# EAGLE board Single_Supply_Logic_Level_Converter-Panel-Panel (EAGLE 9.1.0), part 1 of 7
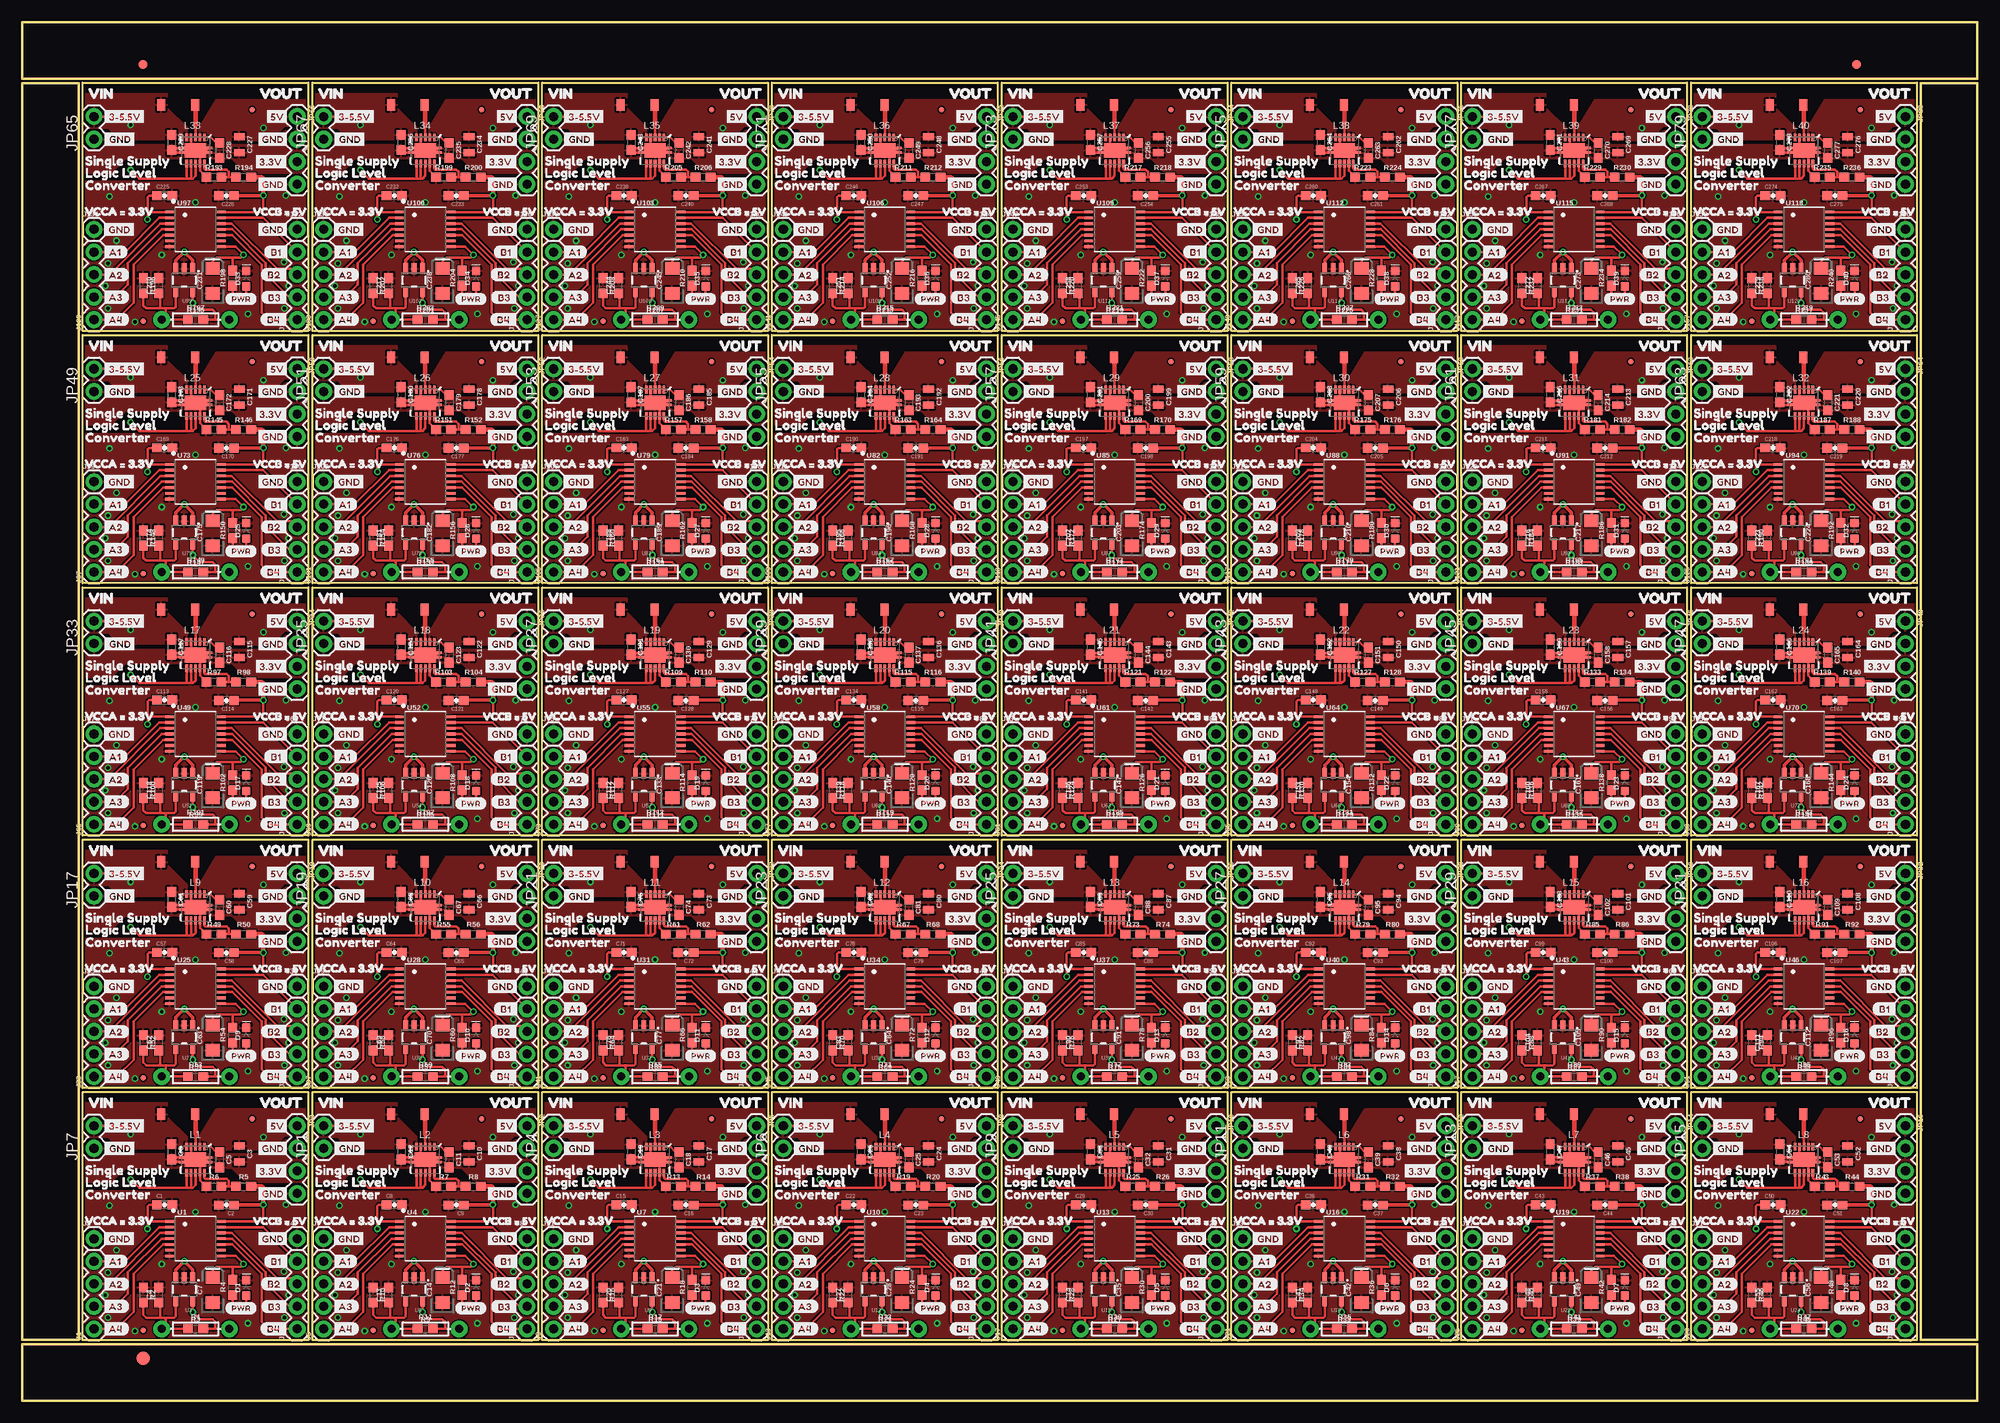
[diagram p0: board, top side]
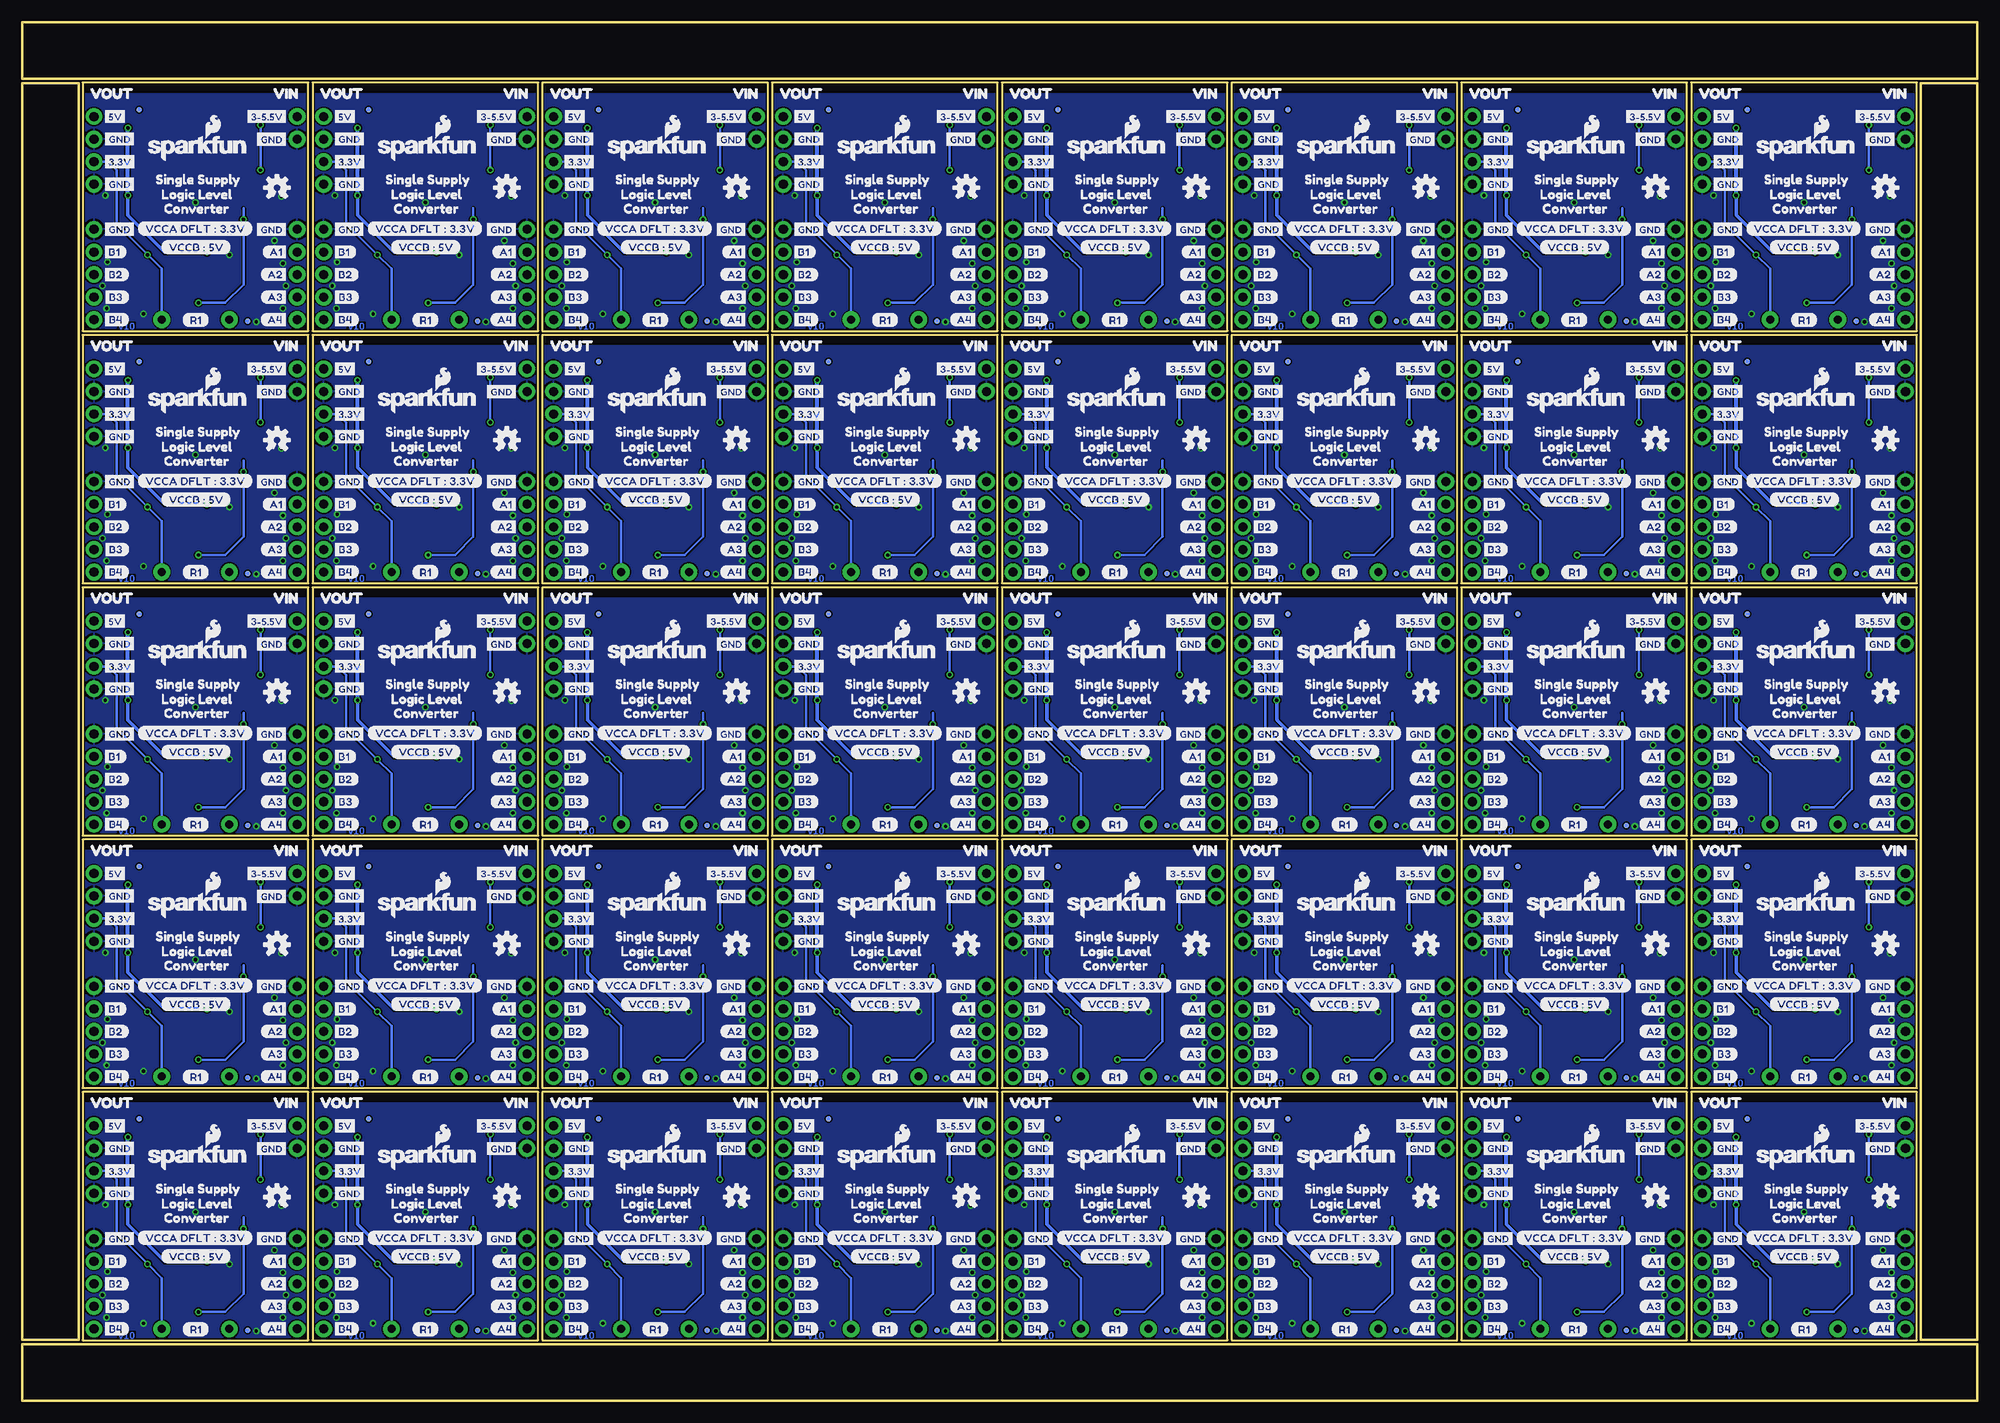
[diagram p1: board, bottom side, seen from below]

Size 220.01 x 155.14 mm. Coordinates in mm from the lower left corner, seen from the top.
Outline: 6.81,6.81 6.81,34.75 32.21,34.75 32.21,6.81 6.81,6.81
Outline: 32.66,6.81 32.66,34.75 58.06,34.75 58.06,6.81 32.66,6.81
Outline: 58.52,6.81 58.52,34.75 83.92,34.75 83.92,6.81 58.52,6.81
Outline: 84.38,6.81 84.38,34.75 109.78,34.75 109.78,6.81 84.38,6.81
Outline: 110.24,6.81 110.24,34.75 135.64,34.75 135.64,6.81 110.24,6.81
Outline: 136.09,6.81 136.09,34.75 161.49,34.75 161.49,6.81 136.09,6.81
Outline: 161.95,6.81 161.95,34.75 187.35,34.75 187.35,6.81 161.95,6.81
Outline: 187.81,6.81 187.81,34.75 213.21,34.75 213.21,6.81 187.81,6.81
Outline: 6.81,35.2 6.81,63.14 32.21,63.14 32.21,35.2 6.81,35.2
Outline: 32.66,35.2 32.66,63.14 58.06,63.14 58.06,35.2 32.66,35.2
Outline: 58.52,35.2 58.52,63.14 83.92,63.14 83.92,35.2 58.52,35.2
Outline: 84.38,35.2 84.38,63.14 109.78,63.14 109.78,35.2 84.38,35.2
Outline: 110.24,35.2 110.24,63.14 135.64,63.14 135.64,35.2 110.24,35.2
Outline: 136.09,35.2 136.09,63.14 161.49,63.14 161.49,35.2 136.09,35.2
Outline: 161.95,35.2 161.95,63.14 187.35,63.14 187.35,35.2 161.95,35.2
Outline: 187.81,35.2 187.81,63.14 213.21,63.14 213.21,35.2 187.81,35.2
Outline: 6.81,63.6 6.81,91.54 32.21,91.54 32.21,63.6 6.81,63.6
Outline: 32.66,63.6 32.66,91.54 58.06,91.54 58.06,63.6 32.66,63.6
Outline: 58.52,63.6 58.52,91.54 83.92,91.54 83.92,63.6 58.52,63.6
Outline: 84.38,63.6 84.38,91.54 109.78,91.54 109.78,63.6 84.38,63.6
Outline: 110.24,63.6 110.24,91.54 135.64,91.54 135.64,63.6 110.24,63.6
Outline: 136.09,63.6 136.09,91.54 161.49,91.54 161.49,63.6 136.09,63.6
Outline: 161.95,63.6 161.95,91.54 187.35,91.54 187.35,63.6 161.95,63.6
Outline: 187.81,63.6 187.81,91.54 213.21,91.54 213.21,63.6 187.81,63.6
Outline: 6.81,92 6.81,119.94 32.21,119.94 32.21,92 6.81,92
Outline: 32.66,92 32.66,119.94 58.06,119.94 58.06,92 32.66,92
Outline: 58.52,92 58.52,119.94 83.92,119.94 83.92,92 58.52,92
Outline: 84.38,92 84.38,119.94 109.78,119.94 109.78,92 84.38,92
Outline: 110.24,92 110.24,119.94 135.64,119.94 135.64,92 110.24,92
Outline: 136.09,92 136.09,119.94 161.49,119.94 161.49,92 136.09,92
Outline: 161.95,92 161.95,119.94 187.35,119.94 187.35,92 161.95,92
Outline: 187.81,92 187.81,119.94 213.21,119.94 213.21,92 187.81,92
Outline: 6.81,120.4 6.81,148.34 32.21,148.34 32.21,120.4 6.81,120.4
Outline: 32.66,120.4 32.66,148.34 58.06,148.34 58.06,120.4 32.66,120.4
Outline: 58.52,120.4 58.52,148.34 83.92,148.34 83.92,120.4 58.52,120.4
Outline: 84.38,120.4 84.38,148.34 109.78,148.34 109.78,120.4 84.38,120.4
Outline: 110.24,120.4 110.24,148.34 135.64,148.34 135.64,120.4 110.24,120.4
Outline: 136.09,120.4 136.09,148.34 161.49,148.34 161.49,120.4 136.09,120.4
Outline: 161.95,120.4 161.95,148.34 187.35,148.34 187.35,120.4 161.95,120.4
Outline: 187.81,120.4 187.81,148.34 213.21,148.34 213.21,120.4 187.81,120.4
Outline: 0,6.35 220.02,6.35 220.02,0 0,0 0,6.35
Outline: 213.67,148.29 220.02,148.29 220.02,6.86 213.67,6.86 213.67,148.29
Outline: 0,155.14 220.02,155.14 220.02,148.79 0,148.79 0,155.14
Outline: 0,148.29 6.35,148.29 6.35,6.86 0,6.86 0,148.29
Copper layers (1*16): Top 0.035mm / dielectric 1.5mm / Bottom 0.035mm
Design rules "SparkFun-2-layer-PCBWay-LIMIT": minimum track width 6mil, minimum drill 0.3mm, track to track 6mil, track to pad 6mil, pad to pad 6mil, via to via 6mil, smd to smd 6mil, copper to edge 6mil, drill to drill 6mil, minimum pad ring 7mil, minimum via ring 7mil, stop-mask expansion 4mil, vias tented up to drill 25mil, thermal gap 10mil
Net classes: 0 Default: width 0.203 mm

## Footprints (pad centres in the part's own frame; a part is rotated, then mirrored left to right if it is on the bottom)
0603-CAP = smd 1.1 x 1: 1 -0.85,0; 2 0.85,0
0805 = smd 0.8 x 1.2: 1 -0.9,0; 2 0.9,0
0603 = smd 1.1 x 1: 1 -0.85,0; 2 0.85,0
EIA3216 = smd 1.4 x 1.6: + 1.4,0; - -1.4,0
LED-0603 = smd 1 x 1: A -0.877,0; C 0.877,0
FIDUCIAL-1X2 = smd 1 x 1: 1 0,0
FIDUCIAL-1.5X3 = smd 1.5 x 1.5: 1 0,0
FIDUCIAL-MICRO = smd 0.635 x 0.635: 1 0,0
1X04 = drill 1.016 pad 1.88: 1 0,0; 2 2.54,0; 3 5.08,0; 4 7.62,0
1X01 = drill 1.016 pad 1.88: 1 0,0
1X02 = drill 1.016 pad 1.88: 1 0,0; 2 2.54,0
INDUCTOR_2.2UH = smd 0.9 x 1.3: P$1 -1.9,0; P$2 1.9,0
AXIAL-0.3 = drill 0.9 pad 1.88: P$1 -3.81,0; P$2 3.81,0
TSSOP14 = smd 0.305 x 0.991: 1 -1.95,-2.918; 2 -1.3,-2.918; 3 -0.65,-2.918; 4 0,-2.918; 5 0.65,-2.918; 6 1.3,-2.918; 7 1.95,-2.918; 8 1.95,2.918; 9 1.3,2.918; 10 0.65,2.918; 11 0,2.918; 12 -0.65,2.918; 13 -1.3,2.918; 14 -1.95,2.918
QFN-10_PAD = smd 0.297 x 0.85: 1 -1,-1.475; 2 -0.5,-1.475; 3 0,-1.475; 4 0.5,-1.475; 5 1,-1.475; 6 1,1.475; 7 0.5,1.475; 8 0,1.475; 9 -0.5,1.475; 10 -1,1.475 | smd 0.7 x 0.28: 11 -1.5,0.25; 12 -1.5,-0.25; 13 1.5,0.25; 14 1.5,-0.25 | smd 2.4 x 1.65: 15 0,0
SOT23-5 = smd 0.55 x 1.2: 1 -0.95,-1.3; 2 0,-1.3; 3 0.95,-1.3; 4 0.95,1.3; 5 -0.95,1.3

## Placement (x,y rotation side)
C1  0.1uF  [0603-CAP]  16.01,22.05 0 top
C2  0.1uF  [0603-CAP]  22.98,22.02 180 top
C3  22uF  [0805]  24.43,27.76 270 top
C4  470pF  [0603]  15.38,11.89 90 top
C5  0.1uF  [0603]  22.21,27.13 270 top
C6  10uF  [0603]  16.81,28.03 270 top
C7  10uF  [EIA3216]  21.44,12.45 90 top
C8  0.1uF  [0603-CAP]  41.87,22.05 0 top
C9  0.1uF  [0603-CAP]  48.84,22.02 180 top
C10  22uF  [0805]  50.29,27.76 270 top
C11  0.1uF  [0603]  48.06,27.13 270 top
C12  10uF  [0603]  42.66,28.03 270 top
C13  470pF  [0603]  41.24,11.89 90 top
C14  10uF  [EIA3216]  47.3,12.45 90 top
C15  0.1uF  [0603-CAP]  67.73,22.05 0 top
C16  0.1uF  [0603-CAP]  74.7,22.02 180 top
C17  22uF  [0805]  76.14,27.76 270 top
C18  0.1uF  [0603]  73.92,27.13 270 top
C19  10uF  [0603]  68.52,28.03 270 top
C20  470pF  [0603]  67.09,11.89 90 top
C21  10uF  [EIA3216]  73.16,12.45 90 top
C22  0.1uF  [0603-CAP]  93.59,22.05 0 top
C23  0.1uF  [0603-CAP]  100.55,22.02 180 top
C24  22uF  [0805]  102,27.76 270 top
C25  0.1uF  [0603]  99.78,27.13 270 top
C26  10uF  [0603]  94.38,28.03 270 top
C27  470pF  [0603]  92.95,11.89 90 top
C28  10uF  [EIA3216]  99.02,12.45 90 top
C29  0.1uF  [0603-CAP]  119.44,22.05 0 top
C30  0.1uF  [0603-CAP]  126.41,22.02 180 top
C31  22uF  [0805]  127.86,27.76 270 top
C32  0.1uF  [0603]  125.63,27.13 270 top
C33  10uF  [0603]  120.23,28.03 270 top
C34  470pF  [0603]  118.81,11.89 90 top
C35  10uF  [EIA3216]  124.87,12.45 90 top
C36  0.1uF  [0603-CAP]  145.3,22.05 0 top
C37  0.1uF  [0603-CAP]  152.27,22.02 180 top
C38  22uF  [0805]  153.71,27.76 270 top
C39  0.1uF  [0603]  151.49,27.13 270 top
C40  10uF  [0603]  146.09,28.03 270 top
C41  470pF  [0603]  144.67,11.89 90 top
C42  10uF  [EIA3216]  150.73,12.45 90 top
C43  0.1uF  [0603-CAP]  171.16,22.05 0 top
C44  0.1uF  [0603-CAP]  178.12,22.02 180 top
C45  22uF  [0805]  179.57,27.76 270 top
C46  0.1uF  [0603]  177.35,27.13 270 top
C47  10uF  [0603]  171.95,28.03 270 top
C48  470pF  [0603]  170.52,11.89 90 top
C49  10uF  [EIA3216]  176.59,12.45 90 top
C50  0.1uF  [0603-CAP]  197.02,22.05 0 top
C51  0.1uF  [0603-CAP]  203.98,22.02 180 top
C52  22uF  [0805]  205.43,27.76 270 top
C53  0.1uF  [0603]  203.21,27.13 270 top
C54  10uF  [0603]  197.81,28.03 270 top
C55  470pF  [0603]  196.38,11.89 90 top
C56  10uF  [EIA3216]  202.44,12.45 90 top
C57  0.1uF  [0603-CAP]  16.01,50.44 0 top
C58  0.1uF  [0603-CAP]  22.98,50.42 180 top
C59  22uF  [0805]  24.43,56.16 270 top
C60  0.1uF  [0603]  22.21,55.52 270 top
C61  10uF  [0603]  16.81,56.42 270 top
C62  470pF  [0603]  15.38,40.28 90 top
C63  10uF  [EIA3216]  21.44,40.84 90 top
C64  0.1uF  [0603-CAP]  41.87,50.44 0 top
C65  0.1uF  [0603-CAP]  48.84,50.42 180 top
C66  22uF  [0805]  50.29,56.16 270 top
C67  0.1uF  [0603]  48.06,55.52 270 top
C68  10uF  [0603]  42.66,56.42 270 top
C69  470pF  [0603]  41.24,40.28 90 top
C70  10uF  [EIA3216]  47.3,40.84 90 top
C71  0.1uF  [0603-CAP]  67.73,50.44 0 top
C72  0.1uF  [0603-CAP]  74.7,50.42 180 top
C73  22uF  [0805]  76.14,56.16 270 top
C74  0.1uF  [0603]  73.92,55.52 270 top
C75  10uF  [0603]  68.52,56.42 270 top
C76  470pF  [0603]  67.09,40.28 90 top
C77  10uF  [EIA3216]  73.16,40.84 90 top
C78  0.1uF  [0603-CAP]  93.59,50.44 0 top
C79  0.1uF  [0603-CAP]  100.55,50.42 180 top
C80  22uF  [0805]  102,56.16 270 top
C81  0.1uF  [0603]  99.78,55.52 270 top
C82  10uF  [0603]  94.38,56.42 270 top
C83  470pF  [0603]  92.95,40.28 90 top
C84  10uF  [EIA3216]  99.02,40.84 90 top
C85  0.1uF  [0603-CAP]  119.44,50.44 0 top
C86  0.1uF  [0603-CAP]  126.41,50.42 180 top
C87  22uF  [0805]  127.86,56.16 270 top
C88  0.1uF  [0603]  125.63,55.52 270 top
C89  10uF  [0603]  120.23,56.42 270 top
C90  470pF  [0603]  118.81,40.28 90 top
C91  10uF  [EIA3216]  124.87,40.84 90 top
C92  0.1uF  [0603-CAP]  145.3,50.44 0 top
C93  0.1uF  [0603-CAP]  152.27,50.42 180 top
C94  22uF  [0805]  153.71,56.16 270 top
C95  0.1uF  [0603]  151.49,55.52 270 top
C96  10uF  [0603]  146.09,56.42 270 top
C97  470pF  [0603]  144.67,40.28 90 top
C98  10uF  [EIA3216]  150.73,40.84 90 top
C99  0.1uF  [0603-CAP]  171.16,50.44 0 top
C100  0.1uF  [0603-CAP]  178.12,50.42 180 top
C101  22uF  [0805]  179.57,56.16 270 top
C102  0.1uF  [0603]  177.35,55.52 270 top
C103  10uF  [0603]  171.95,56.42 270 top
C104  470pF  [0603]  170.52,40.28 90 top
C105  10uF  [EIA3216]  176.59,40.84 90 top
C106  0.1uF  [0603-CAP]  197.02,50.44 0 top
C107  0.1uF  [0603-CAP]  203.98,50.42 180 top
C108  22uF  [0805]  205.43,56.16 270 top
C109  0.1uF  [0603]  203.21,55.52 270 top
C110  10uF  [0603]  197.81,56.42 270 top
C111  470pF  [0603]  196.38,40.28 90 top
C112  10uF  [EIA3216]  202.44,40.84 90 top
C113  0.1uF  [0603-CAP]  16.01,78.84 0 top
C114  0.1uF  [0603-CAP]  22.98,78.82 180 top
C115  22uF  [0805]  24.43,84.56 270 top
C116  0.1uF  [0603]  22.21,83.92 270 top
C117  10uF  [0603]  16.81,84.82 270 top
C118  470pF  [0603]  15.38,68.68 90 top
C119  10uF  [EIA3216]  21.44,69.24 90 top
C120  0.1uF  [0603-CAP]  41.87,78.84 0 top
C121  0.1uF  [0603-CAP]  48.84,78.82 180 top
C122  22uF  [0805]  50.29,84.56 270 top
C123  0.1uF  [0603]  48.06,83.92 270 top
C124  10uF  [0603]  42.66,84.82 270 top
C125  470pF  [0603]  41.24,68.68 90 top
C126  10uF  [EIA3216]  47.3,69.24 90 top
C127  0.1uF  [0603-CAP]  67.73,78.84 0 top
C128  0.1uF  [0603-CAP]  74.7,78.82 180 top
C129  22uF  [0805]  76.14,84.56 270 top
C130  0.1uF  [0603]  73.92,83.92 270 top
C131  10uF  [0603]  68.52,84.82 270 top
C132  470pF  [0603]  67.09,68.68 90 top
C133  10uF  [EIA3216]  73.16,69.24 90 top
C134  0.1uF  [0603-CAP]  93.59,78.84 0 top
C135  0.1uF  [0603-CAP]  100.55,78.82 180 top
C136  22uF  [0805]  102,84.56 270 top
C137  0.1uF  [0603]  99.78,83.92 270 top
C138  10uF  [0603]  94.38,84.82 270 top
C139  470pF  [0603]  92.95,68.68 90 top
C140  10uF  [EIA3216]  99.02,69.24 90 top
C141  0.1uF  [0603-CAP]  119.44,78.84 0 top
C142  0.1uF  [0603-CAP]  126.41,78.82 180 top
C143  22uF  [0805]  127.86,84.56 270 top
C144  0.1uF  [0603]  125.63,83.92 270 top
C145  10uF  [0603]  120.23,84.82 270 top
C146  470pF  [0603]  118.81,68.68 90 top
C147  10uF  [EIA3216]  124.87,69.24 90 top
C148  0.1uF  [0603-CAP]  145.3,78.84 0 top
C149  0.1uF  [0603-CAP]  152.27,78.82 180 top
C150  22uF  [0805]  153.71,84.56 270 top
C151  0.1uF  [0603]  151.49,83.92 270 top
C152  10uF  [0603]  146.09,84.82 270 top
C153  470pF  [0603]  144.67,68.68 90 top
C154  10uF  [EIA3216]  150.73,69.24 90 top
C155  0.1uF  [0603-CAP]  171.16,78.84 0 top
C156  0.1uF  [0603-CAP]  178.12,78.82 180 top
C157  22uF  [0805]  179.57,84.56 270 top
C158  0.1uF  [0603]  177.35,83.92 270 top
C159  10uF  [0603]  171.95,84.82 270 top
C160  470pF  [0603]  170.52,68.68 90 top
C161  10uF  [EIA3216]  176.59,69.24 90 top
C162  0.1uF  [0603-CAP]  197.02,78.84 0 top
C163  0.1uF  [0603-CAP]  203.98,78.82 180 top
C164  22uF  [0805]  205.43,84.56 270 top
C165  0.1uF  [0603]  203.21,83.92 270 top
C166  10uF  [0603]  197.81,84.82 270 top
C167  470pF  [0603]  196.38,68.68 90 top
C168  10uF  [EIA3216]  202.44,69.24 90 top
C169  0.1uF  [0603-CAP]  16.01,107.24 0 top
C170  0.1uF  [0603-CAP]  22.98,107.21 180 top
C171  22uF  [0805]  24.43,112.95 270 top
C172  0.1uF  [0603]  22.21,112.32 270 top
C173  10uF  [0603]  16.81,113.22 270 top
C174  470pF  [0603]  15.38,97.08 90 top
C175  10uF  [EIA3216]  21.44,97.64 90 top
C176  0.1uF  [0603-CAP]  41.87,107.24 0 top
C177  0.1uF  [0603-CAP]  48.84,107.21 180 top
C178  22uF  [0805]  50.29,112.95 270 top
C179  0.1uF  [0603]  48.06,112.32 270 top
C180  10uF  [0603]  42.66,113.22 270 top
C181  470pF  [0603]  41.24,97.08 90 top
C182  10uF  [EIA3216]  47.3,97.64 90 top
C183  0.1uF  [0603-CAP]  67.73,107.24 0 top
C184  0.1uF  [0603-CAP]  74.7,107.21 180 top
C185  22uF  [0805]  76.14,112.95 270 top
C186  0.1uF  [0603]  73.92,112.32 270 top
C187  10uF  [0603]  68.52,113.22 270 top
C188  470pF  [0603]  67.09,97.08 90 top
C189  10uF  [EIA3216]  73.16,97.64 90 top
C190  0.1uF  [0603-CAP]  93.59,107.24 0 top
C191  0.1uF  [0603-CAP]  100.55,107.21 180 top
C192  22uF  [0805]  102,112.95 270 top
C193  0.1uF  [0603]  99.78,112.32 270 top
C194  10uF  [0603]  94.38,113.22 270 top
C195  470pF  [0603]  92.95,97.08 90 top
C196  10uF  [EIA3216]  99.02,97.64 90 top
C197  0.1uF  [0603-CAP]  119.44,107.24 0 top
C198  0.1uF  [0603-CAP]  126.41,107.21 180 top
C199  22uF  [0805]  127.86,112.95 270 top
C200  0.1uF  [0603]  125.63,112.32 270 top
C201  10uF  [0603]  120.23,113.22 270 top
C202  470pF  [0603]  118.81,97.08 90 top
C203  10uF  [EIA3216]  124.87,97.64 90 top
C204  0.1uF  [0603-CAP]  145.3,107.24 0 top
C205  0.1uF  [0603-CAP]  152.27,107.21 180 top
C206  22uF  [0805]  153.71,112.95 270 top
C207  0.1uF  [0603]  151.49,112.32 270 top
C208  10uF  [0603]  146.09,113.22 270 top
C209  470pF  [0603]  144.67,97.08 90 top
C210  10uF  [EIA3216]  150.73,97.64 90 top
C211  0.1uF  [0603-CAP]  171.16,107.24 0 top
C212  0.1uF  [0603-CAP]  178.12,107.21 180 top
C213  22uF  [0805]  179.57,112.95 270 top
C214  0.1uF  [0603]  177.35,112.32 270 top
C215  10uF  [0603]  171.95,113.22 270 top
C216  470pF  [0603]  170.52,97.08 90 top
C217  10uF  [EIA3216]  176.59,97.64 90 top
C218  0.1uF  [0603-CAP]  197.02,107.24 0 top
C219  0.1uF  [0603-CAP]  203.98,107.21 180 top
C220  22uF  [0805]  205.43,112.95 270 top
C221  0.1uF  [0603]  203.21,112.32 270 top
C222  10uF  [0603]  197.81,113.22 270 top
C223  470pF  [0603]  196.38,97.08 90 top
C224  10uF  [EIA3216]  202.44,97.64 90 top
C225  0.1uF  [0603-CAP]  16.01,135.64 0 top
C226  0.1uF  [0603-CAP]  22.98,135.61 180 top
C227  22uF  [0805]  24.43,141.35 270 top
C228  0.1uF  [0603]  22.21,140.72 270 top
C229  10uF  [0603]  16.81,141.61 270 top
C230  470pF  [0603]  15.38,125.48 90 top
C231  10uF  [EIA3216]  21.44,126.03 90 top
C232  0.1uF  [0603-CAP]  41.87,135.64 0 top
C233  0.1uF  [0603-CAP]  48.84,135.61 180 top
C234  22uF  [0805]  50.29,141.35 270 top
C235  0.1uF  [0603]  48.06,140.72 270 top
C236  10uF  [0603]  42.66,141.61 270 top
C237  470pF  [0603]  41.24,125.48 90 top
C238  10uF  [EIA3216]  47.3,126.03 90 top
C239  0.1uF  [0603-CAP]  67.73,135.64 0 top
C240  0.1uF  [0603-CAP]  74.7,135.61 180 top
C241  22uF  [0805]  76.14,141.35 270 top
C242  0.1uF  [0603]  73.92,140.72 270 top
C243  10uF  [0603]  68.52,141.61 270 top
C244  470pF  [0603]  67.09,125.48 90 top
C245  10uF  [EIA3216]  73.16,126.03 90 top
C246  0.1uF  [0603-CAP]  93.59,135.64 0 top
C247  0.1uF  [0603-CAP]  100.55,135.61 180 top
C248  22uF  [0805]  102,141.35 270 top
C249  0.1uF  [0603]  99.78,140.72 270 top
C250  10uF  [0603]  94.38,141.61 270 top
C251  470pF  [0603]  92.95,125.48 90 top
C252  10uF  [EIA3216]  99.02,126.03 90 top
C253  0.1uF  [0603-CAP]  119.44,135.64 0 top
C254  0.1uF  [0603-CAP]  126.41,135.61 180 top
C255  22uF  [0805]  127.86,141.35 270 top
C256  0.1uF  [0603]  125.63,140.72 270 top
C257  10uF  [0603]  120.23,141.61 270 top
C258  470pF  [0603]  118.81,125.48 90 top
C259  10uF  [EIA3216]  124.87,126.03 90 top
C260  0.1uF  [0603-CAP]  145.3,135.64 0 top
C261  0.1uF  [0603-CAP]  152.27,135.61 180 top
C262  22uF  [0805]  153.71,141.35 270 top
C263  0.1uF  [0603]  151.49,140.72 270 top
C264  10uF  [0603]  146.09,141.61 270 top
C265  470pF  [0603]  144.67,125.48 90 top
C266  10uF  [EIA3216]  150.73,126.03 90 top
C267  0.1uF  [0603-CAP]  171.16,135.64 0 top
C268  0.1uF  [0603-CAP]  178.12,135.61 180 top
C269  22uF  [0805]  179.57,141.35 270 top
C270  0.1uF  [0603]  177.35,140.72 270 top
C271  10uF  [0603]  171.95,141.61 270 top
C272  470pF  [0603]  170.52,125.48 90 top
C273  10uF  [EIA3216]  176.59,126.03 90 top
C274  0.1uF  [0603-CAP]  197.02,135.64 0 top
C275  0.1uF  [0603-CAP]  203.98,135.61 180 top
C276  22uF  [0805]  205.43,141.35 270 top
C277  0.1uF  [0603]  203.21,140.72 270 top
C278  10uF  [0603]  197.81,141.61 270 top
C279  470pF  [0603]  196.38,125.48 90 top
C280  10uF  [EIA3216]  202.44,126.03 90 top
D1  RED  [LED-0603]  25.21,12.7 90 top
D2  RED  [LED-0603]  51.07,12.7 90 top
D3  RED  [LED-0603]  76.92,12.7 90 top
D4  RED  [LED-0603]  102.78,12.7 90 top
D5  RED  [LED-0603]  128.64,12.7 90 top
D6  RED  [LED-0603]  154.5,12.7 90 top
D7  RED  [LED-0603]  180.35,12.7 90 top
D8  RED  [LED-0603]  206.21,12.7 90 top
D9  RED  [LED-0603]  25.21,41.1 90 top
D10  RED  [LED-0603]  51.07,41.1 90 top
D11  RED  [LED-0603]  76.92,41.1 90 top
D12  RED  [LED-0603]  102.78,41.1 90 top
D13  RED  [LED-0603]  128.64,41.1 90 top
D14  RED  [LED-0603]  154.5,41.1 90 top
D15  RED  [LED-0603]  180.35,41.1 90 top
D16  RED  [LED-0603]  206.21,41.1 90 top
D17  RED  [LED-0603]  25.21,69.49 90 top
D18  RED  [LED-0603]  51.07,69.49 90 top
D19  RED  [LED-0603]  76.92,69.49 90 top
D20  RED  [LED-0603]  102.78,69.49 90 top
D21  RED  [LED-0603]  128.64,69.49 90 top
D22  RED  [LED-0603]  154.5,69.49 90 top
D23  RED  [LED-0603]  180.35,69.49 90 top
D24  RED  [LED-0603]  206.21,69.49 90 top
D25  RED  [LED-0603]  25.21,97.89 90 top
D26  RED  [LED-0603]  51.07,97.89 90 top
D27  RED  [LED-0603]  76.92,97.89 90 top
D28  RED  [LED-0603]  102.78,97.89 90 top
D29  RED  [LED-0603]  128.64,97.89 90 top
D30  RED  [LED-0603]  154.5,97.89 90 top
D31  RED  [LED-0603]  180.35,97.89 90 top
D32  RED  [LED-0603]  206.21,97.89 90 top
D33  RED  [LED-0603]  25.21,126.29 90 top
D34  RED  [LED-0603]  51.07,126.29 90 top
D35  RED  [LED-0603]  76.92,126.29 90 top
D36  RED  [LED-0603]  102.78,126.29 90 top
D37  RED  [LED-0603]  128.64,126.29 90 top
D38  RED  [LED-0603]  154.5,126.29 90 top
D39  RED  [LED-0603]  180.35,126.29 90 top
D40  RED  [LED-0603]  206.21,126.29 90 top
E$1  [FIDUCIAL-1X2]  13.61,150.38 0 top
E$2  [FIDUCIAL-1X2]  206.4,150.38 0 top
E$3  [FIDUCIAL-1.5X3]  13.61,4.76 0 top
FD1  FIDUCIALUFIDUCIAL  [FIDUCIAL-MICRO]  25.86,31.73 0 top
FD2  FIDUCIALUFIDUCIAL  [FIDUCIAL-MICRO]  25.86,31.73 0 bottom
FD3  FIDUCIALUFIDUCIAL  [FIDUCIAL-MICRO]  13.63,7.92 0 top
FD4  FIDUCIALUFIDUCIAL  [FIDUCIAL-MICRO]  13.63,7.92 0 bottom
FD5  FIDUCIALUFIDUCIAL  [FIDUCIAL-MICRO]  51.71,31.73 0 top
FD6  FIDUCIALUFIDUCIAL  [FIDUCIAL-MICRO]  51.71,31.73 0 bottom
FD7  FIDUCIALUFIDUCIAL  [FIDUCIAL-MICRO]  39.49,7.92 0 bottom
FD8  FIDUCIALUFIDUCIAL  [FIDUCIAL-MICRO]  39.49,7.92 0 top
FD9  FIDUCIALUFIDUCIAL  [FIDUCIAL-MICRO]  77.57,31.73 0 top
FD10  FIDUCIALUFIDUCIAL  [FIDUCIAL-MICRO]  77.57,31.73 0 bottom
FD11  FIDUCIALUFIDUCIAL  [FIDUCIAL-MICRO]  65.35,7.92 0 bottom
FD12  FIDUCIALUFIDUCIAL  [FIDUCIAL-MICRO]  65.35,7.92 0 top
FD13  FIDUCIALUFIDUCIAL  [FIDUCIAL-MICRO]  103.43,31.73 0 top
FD14  FIDUCIALUFIDUCIAL  [FIDUCIAL-MICRO]  103.43,31.73 0 bottom
FD15  FIDUCIALUFIDUCIAL  [FIDUCIAL-MICRO]  91.21,7.92 0 bottom
FD16  FIDUCIALUFIDUCIAL  [FIDUCIAL-MICRO]  91.21,7.92 0 top
FD17  FIDUCIALUFIDUCIAL  [FIDUCIAL-MICRO]  129.29,31.73 0 top
FD18  FIDUCIALUFIDUCIAL  [FIDUCIAL-MICRO]  129.29,31.73 0 bottom
FD19  FIDUCIALUFIDUCIAL  [FIDUCIAL-MICRO]  117.06,7.92 0 bottom
FD20  FIDUCIALUFIDUCIAL  [FIDUCIAL-MICRO]  117.06,7.92 0 top
FD21  FIDUCIALUFIDUCIAL  [FIDUCIAL-MICRO]  155.14,31.73 0 top
FD22  FIDUCIALUFIDUCIAL  [FIDUCIAL-MICRO]  155.14,31.73 0 bottom
FD23  FIDUCIALUFIDUCIAL  [FIDUCIAL-MICRO]  142.92,7.92 0 bottom
FD24  FIDUCIALUFIDUCIAL  [FIDUCIAL-MICRO]  142.92,7.92 0 top
FD25  FIDUCIALUFIDUCIAL  [FIDUCIAL-MICRO]  181,31.73 0 top
FD26  FIDUCIALUFIDUCIAL  [FIDUCIAL-MICRO]  181,31.73 0 bottom
FD27  FIDUCIALUFIDUCIAL  [FIDUCIAL-MICRO]  168.78,7.92 0 bottom
FD28  FIDUCIALUFIDUCIAL  [FIDUCIAL-MICRO]  168.78,7.92 0 top
FD29  FIDUCIALUFIDUCIAL  [FIDUCIAL-MICRO]  206.86,31.73 0 top
FD30  FIDUCIALUFIDUCIAL  [FIDUCIAL-MICRO]  206.86,31.73 0 bottom
FD31  FIDUCIALUFIDUCIAL  [FIDUCIAL-MICRO]  194.63,7.92 0 bottom
FD32  FIDUCIALUFIDUCIAL  [FIDUCIAL-MICRO]  194.63,7.92 0 top
FD33  FIDUCIALUFIDUCIAL  [FIDUCIAL-MICRO]  25.86,60.13 0 top
FD34  FIDUCIALUFIDUCIAL  [FIDUCIAL-MICRO]  25.86,60.13 0 bottom
FD35  FIDUCIALUFIDUCIAL  [FIDUCIAL-MICRO]  13.63,36.32 0 bottom
FD36  FIDUCIALUFIDUCIAL  [FIDUCIAL-MICRO]  13.63,36.32 0 top
FD37  FIDUCIALUFIDUCIAL  [FIDUCIAL-MICRO]  51.71,60.13 0 top
FD38  FIDUCIALUFIDUCIAL  [FIDUCIAL-MICRO]  51.71,60.13 0 bottom
FD39  FIDUCIALUFIDUCIAL  [FIDUCIAL-MICRO]  39.49,36.32 0 bottom
FD40  FIDUCIALUFIDUCIAL  [FIDUCIAL-MICRO]  39.49,36.32 0 top
FD41  FIDUCIALUFIDUCIAL  [FIDUCIAL-MICRO]  77.57,60.13 0 top
FD42  FIDUCIALUFIDUCIAL  [FIDUCIAL-MICRO]  77.57,60.13 0 bottom
FD43  FIDUCIALUFIDUCIAL  [FIDUCIAL-MICRO]  65.35,36.32 0 bottom
FD44  FIDUCIALUFIDUCIAL  [FIDUCIAL-MICRO]  65.35,36.32 0 top
FD45  FIDUCIALUFIDUCIAL  [FIDUCIAL-MICRO]  103.43,60.13 0 top
FD46  FIDUCIALUFIDUCIAL  [FIDUCIAL-MICRO]  103.43,60.13 0 bottom
FD47  FIDUCIALUFIDUCIAL  [FIDUCIAL-MICRO]  91.21,36.32 0 bottom
FD48  FIDUCIALUFIDUCIAL  [FIDUCIAL-MICRO]  91.21,36.32 0 top
FD49  FIDUCIALUFIDUCIAL  [FIDUCIAL-MICRO]  129.29,60.13 0 top
FD50  FIDUCIALUFIDUCIAL  [FIDUCIAL-MICRO]  129.29,60.13 0 bottom
FD51  FIDUCIALUFIDUCIAL  [FIDUCIAL-MICRO]  117.06,36.32 0 bottom
FD52  FIDUCIALUFIDUCIAL  [FIDUCIAL-MICRO]  117.06,36.32 0 top
FD53  FIDUCIALUFIDUCIAL  [FIDUCIAL-MICRO]  155.14,60.13 0 top
FD54  FIDUCIALUFIDUCIAL  [FIDUCIAL-MICRO]  155.14,60.13 0 bottom
FD55  FIDUCIALUFIDUCIAL  [FIDUCIAL-MICRO]  142.92,36.32 0 bottom
FD56  FIDUCIALUFIDUCIAL  [FIDUCIAL-MICRO]  142.92,36.32 0 top
FD57  FIDUCIALUFIDUCIAL  [FIDUCIAL-MICRO]  181,60.13 0 top
FD58  FIDUCIALUFIDUCIAL  [FIDUCIAL-MICRO]  181,60.13 0 bottom
FD59  FIDUCIALUFIDUCIAL  [FIDUCIAL-MICRO]  168.78,36.32 0 bottom
FD60  FIDUCIALUFIDUCIAL  [FIDUCIAL-MICRO]  168.78,36.32 0 top
FD61  FIDUCIALUFIDUCIAL  [FIDUCIAL-MICRO]  206.86,60.13 0 top
FD62  FIDUCIALUFIDUCIAL  [FIDUCIAL-MICRO]  206.86,60.13 0 bottom
FD63  FIDUCIALUFIDUCIAL  [FIDUCIAL-MICRO]  194.63,36.32 0 bottom
FD64  FIDUCIALUFIDUCIAL  [FIDUCIAL-MICRO]  194.63,36.32 0 top
FD65  FIDUCIALUFIDUCIAL  [FIDUCIAL-MICRO]  25.86,88.53 0 top
FD66  FIDUCIALUFIDUCIAL  [FIDUCIAL-MICRO]  25.86,88.53 0 bottom
FD67  FIDUCIALUFIDUCIAL  [FIDUCIAL-MICRO]  13.63,64.71 0 bottom
FD68  FIDUCIALUFIDUCIAL  [FIDUCIAL-MICRO]  13.63,64.71 0 top
FD69  FIDUCIALUFIDUCIAL  [FIDUCIAL-MICRO]  51.71,88.53 0 top
FD70  FIDUCIALUFIDUCIAL  [FIDUCIAL-MICRO]  51.71,88.53 0 bottom
FD71  FIDUCIALUFIDUCIAL  [FIDUCIAL-MICRO]  39.49,64.71 0 bottom
FD72  FIDUCIALUFIDUCIAL  [FIDUCIAL-MICRO]  39.49,64.71 0 top
FD73  FIDUCIALUFIDUCIAL  [FIDUCIAL-MICRO]  77.57,88.53 0 top
FD74  FIDUCIALUFIDUCIAL  [FIDUCIAL-MICRO]  77.57,88.53 0 bottom
FD75  FIDUCIALUFIDUCIAL  [FIDUCIAL-MICRO]  65.35,64.71 0 bottom
FD76  FIDUCIALUFIDUCIAL  [FIDUCIAL-MICRO]  65.35,64.71 0 top
FD77  FIDUCIALUFIDUCIAL  [FIDUCIAL-MICRO]  103.43,88.53 0 top
FD78  FIDUCIALUFIDUCIAL  [FIDUCIAL-MICRO]  103.43,88.53 0 bottom
FD79  FIDUCIALUFIDUCIAL  [FIDUCIAL-MICRO]  91.21,64.71 0 bottom
FD80  FIDUCIALUFIDUCIAL  [FIDUCIAL-MICRO]  91.21,64.71 0 top
FD81  FIDUCIALUFIDUCIAL  [FIDUCIAL-MICRO]  129.29,88.53 0 top
FD82  FIDUCIALUFIDUCIAL  [FIDUCIAL-MICRO]  129.29,88.53 0 bottom
FD83  FIDUCIALUFIDUCIAL  [FIDUCIAL-MICRO]  117.06,64.71 0 bottom
FD84  FIDUCIALUFIDUCIAL  [FIDUCIAL-MICRO]  117.06,64.71 0 top
FD85  FIDUCIALUFIDUCIAL  [FIDUCIAL-MICRO]  155.14,88.53 0 top
FD86  FIDUCIALUFIDUCIAL  [FIDUCIAL-MICRO]  155.14,88.53 0 bottom
FD87  FIDUCIALUFIDUCIAL  [FIDUCIAL-MICRO]  142.92,64.71 0 bottom
FD88  FIDUCIALUFIDUCIAL  [FIDUCIAL-MICRO]  142.92,64.71 0 top
FD89  FIDUCIALUFIDUCIAL  [FIDUCIAL-MICRO]  181,88.53 0 top
FD90  FIDUCIALUFIDUCIAL  [FIDUCIAL-MICRO]  181,88.53 0 bottom
FD91  FIDUCIALUFIDUCIAL  [FIDUCIAL-MICRO]  168.78,64.71 0 bottom
FD92  FIDUCIALUFIDUCIAL  [FIDUCIAL-MICRO]  168.78,64.71 0 top
FD93  FIDUCIALUFIDUCIAL  [FIDUCIAL-MICRO]  206.86,88.53 0 top
FD94  FIDUCIALUFIDUCIAL  [FIDUCIAL-MICRO]  206.86,88.53 0 bottom
FD95  FIDUCIALUFIDUCIAL  [FIDUCIAL-MICRO]  194.63,64.71 0 bottom
FD96  FIDUCIALUFIDUCIAL  [FIDUCIAL-MICRO]  194.63,64.71 0 top
FD97  FIDUCIALUFIDUCIAL  [FIDUCIAL-MICRO]  25.86,116.92 0 top
FD98  FIDUCIALUFIDUCIAL  [FIDUCIAL-MICRO]  25.86,116.92 0 bottom
FD99  FIDUCIALUFIDUCIAL  [FIDUCIAL-MICRO]  13.63,93.11 0 bottom
FD100  FIDUCIALUFIDUCIAL  [FIDUCIAL-MICRO]  13.63,93.11 0 top
FD101  FIDUCIALUFIDUCIAL  [FIDUCIAL-MICRO]  51.71,116.92 0 top
FD102  FIDUCIALUFIDUCIAL  [FIDUCIAL-MICRO]  51.71,116.92 0 bottom
FD103  FIDUCIALUFIDUCIAL  [FIDUCIAL-MICRO]  39.49,93.11 0 bottom
FD104  FIDUCIALUFIDUCIAL  [FIDUCIAL-MICRO]  39.49,93.11 0 top
FD105  FIDUCIALUFIDUCIAL  [FIDUCIAL-MICRO]  77.57,116.92 0 top
FD106  FIDUCIALUFIDUCIAL  [FIDUCIAL-MICRO]  77.57,116.92 0 bottom
FD107  FIDUCIALUFIDUCIAL  [FIDUCIAL-MICRO]  65.35,93.11 0 bottom
FD108  FIDUCIALUFIDUCIAL  [FIDUCIAL-MICRO]  65.35,93.11 0 top
FD109  FIDUCIALUFIDUCIAL  [FIDUCIAL-MICRO]  103.43,116.92 0 top
FD110  FIDUCIALUFIDUCIAL  [FIDUCIAL-MICRO]  103.43,116.92 0 bottom
FD111  FIDUCIALUFIDUCIAL  [FIDUCIAL-MICRO]  91.21,93.11 0 bottom
FD112  FIDUCIALUFIDUCIAL  [FIDUCIAL-MICRO]  91.21,93.11 0 top
FD113  FIDUCIALUFIDUCIAL  [FIDUCIAL-MICRO]  129.29,116.92 0 top
FD114  FIDUCIALUFIDUCIAL  [FIDUCIAL-MICRO]  129.29,116.92 0 bottom
FD115  FIDUCIALUFIDUCIAL  [FIDUCIAL-MICRO]  117.06,93.11 0 bottom
FD116  FIDUCIALUFIDUCIAL  [FIDUCIAL-MICRO]  117.06,93.11 0 top
FD117  FIDUCIALUFIDUCIAL  [FIDUCIAL-MICRO]  155.14,116.92 0 top
FD118  FIDUCIALUFIDUCIAL  [FIDUCIAL-MICRO]  155.14,116.92 0 bottom
FD119  FIDUCIALUFIDUCIAL  [FIDUCIAL-MICRO]  142.92,93.11 0 bottom
FD120  FIDUCIALUFIDUCIAL  [FIDUCIAL-MICRO]  142.92,93.11 0 top
FD121  FIDUCIALUFIDUCIAL  [FIDUCIAL-MICRO]  181,116.92 0 top
FD122  FIDUCIALUFIDUCIAL  [FIDUCIAL-MICRO]  181,116.92 0 bottom
FD123  FIDUCIALUFIDUCIAL  [FIDUCIAL-MICRO]  168.78,93.11 0 bottom
FD124  FIDUCIALUFIDUCIAL  [FIDUCIAL-MICRO]  168.78,93.11 0 top
FD125  FIDUCIALUFIDUCIAL  [FIDUCIAL-MICRO]  206.86,116.92 0 top
FD126  FIDUCIALUFIDUCIAL  [FIDUCIAL-MICRO]  206.86,116.92 0 bottom
FD127  FIDUCIALUFIDUCIAL  [FIDUCIAL-MICRO]  194.63,93.11 0 bottom
FD128  FIDUCIALUFIDUCIAL  [FIDUCIAL-MICRO]  194.63,93.11 0 top
FD129  FIDUCIALUFIDUCIAL  [FIDUCIAL-MICRO]  25.86,145.32 0 top
FD130  FIDUCIALUFIDUCIAL  [FIDUCIAL-MICRO]  25.86,145.32 0 bottom
FD131  FIDUCIALUFIDUCIAL  [FIDUCIAL-MICRO]  13.63,121.51 0 bottom
FD132  FIDUCIALUFIDUCIAL  [FIDUCIAL-MICRO]  13.63,121.51 0 top
FD133  FIDUCIALUFIDUCIAL  [FIDUCIAL-MICRO]  51.71,145.32 0 top
FD134  FIDUCIALUFIDUCIAL  [FIDUCIAL-MICRO]  51.71,145.32 0 bottom
FD135  FIDUCIALUFIDUCIAL  [FIDUCIAL-MICRO]  39.49,121.51 0 bottom
FD136  FIDUCIALUFIDUCIAL  [FIDUCIAL-MICRO]  39.49,121.51 0 top
FD137  FIDUCIALUFIDUCIAL  [FIDUCIAL-MICRO]  77.57,145.32 0 top
FD138  FIDUCIALUFIDUCIAL  [FIDUCIAL-MICRO]  77.57,145.32 0 bottom
FD139  FIDUCIALUFIDUCIAL  [FIDUCIAL-MICRO]  65.35,121.51 0 bottom
FD140  FIDUCIALUFIDUCIAL  [FIDUCIAL-MICRO]  65.35,121.51 0 top
FD141  FIDUCIALUFIDUCIAL  [FIDUCIAL-MICRO]  103.43,145.32 0 top
FD142  FIDUCIALUFIDUCIAL  [FIDUCIAL-MICRO]  103.43,145.32 0 bottom
FD143  FIDUCIALUFIDUCIAL  [FIDUCIAL-MICRO]  91.21,121.51 0 bottom
FD144  FIDUCIALUFIDUCIAL  [FIDUCIAL-MICRO]  91.21,121.51 0 top
FD145  FIDUCIALUFIDUCIAL  [FIDUCIAL-MICRO]  129.29,145.32 0 top
FD146  FIDUCIALUFIDUCIAL  [FIDUCIAL-MICRO]  129.29,145.32 0 bottom
FD147  FIDUCIALUFIDUCIAL  [FIDUCIAL-MICRO]  117.06,121.51 0 bottom
FD148  FIDUCIALUFIDUCIAL  [FIDUCIAL-MICRO]  117.06,121.51 0 top
FD149  FIDUCIALUFIDUCIAL  [FIDUCIAL-MICRO]  155.14,145.32 0 top
FD150  FIDUCIALUFIDUCIAL  [FIDUCIAL-MICRO]  155.14,145.32 0 bottom
FD151  FIDUCIALUFIDUCIAL  [FIDUCIAL-MICRO]  142.92,121.51 0 bottom
FD152  FIDUCIALUFIDUCIAL  [FIDUCIAL-MICRO]  142.92,121.51 0 top
FD153  FIDUCIALUFIDUCIAL  [FIDUCIAL-MICRO]  181,145.32 0 top
FD154  FIDUCIALUFIDUCIAL  [FIDUCIAL-MICRO]  181,145.32 0 bottom
FD155  FIDUCIALUFIDUCIAL  [FIDUCIAL-MICRO]  168.78,121.51 0 bottom
FD156  FIDUCIALUFIDUCIAL  [FIDUCIAL-MICRO]  168.78,121.51 0 top
FD157  FIDUCIALUFIDUCIAL  [FIDUCIAL-MICRO]  206.86,145.32 0 top
FD158  FIDUCIALUFIDUCIAL  [FIDUCIAL-MICRO]  206.86,145.32 0 bottom
FD159  FIDUCIALUFIDUCIAL  [FIDUCIAL-MICRO]  194.63,121.51 0 bottom
FD160  FIDUCIALUFIDUCIAL  [FIDUCIAL-MICRO]  194.63,121.51 0 top
J1  [1X04]  8.08,8.08 90 top
J2  [1X04]  30.94,8.08 90 top
J3  [1X01]  8.08,18.24 0 top
J4  [1X01]  30.94,18.24 0 top
J5  [1X04]  33.93,8.08 90 top
J6  [1X04]  56.79,8.08 90 top
J7  [1X01]  33.93,18.24 0 top
J8  [1X01]  56.79,18.24 0 top
J9  [1X04]  59.79,8.08 90 top
J10  [1X04]  82.65,8.08 90 top
J11  [1X01]  59.79,18.24 0 top
J12  [1X01]  82.65,18.24 0 top
J13  [1X04]  85.65,8.08 90 top
J14  [1X04]  108.51,8.08 90 top
J15  [1X01]  85.65,18.24 0 top
J16  [1X01]  108.51,18.24 0 top
J17  [1X04]  111.51,8.08 90 top
J18  [1X04]  134.37,8.08 90 top
J19  [1X01]  111.51,18.24 0 top
J20  [1X01]  134.37,18.24 0 top
J21  [1X04]  137.36,8.08 90 top
J22  [1X04]  160.22,8.08 90 top
J23  [1X01]  137.36,18.24 0 top
J24  [1X01]  160.22,18.24 0 top
J25  [1X04]  163.22,8.08 90 top
J26  [1X04]  186.08,8.08 90 top
J27  [1X01]  163.22,18.24 0 top
J28  [1X01]  186.08,18.24 0 top
J29  [1X04]  189.08,8.08 90 top
J30  [1X04]  211.94,8.08 90 top
J31  [1X01]  189.08,18.24 0 top
J32  [1X01]  211.94,18.24 0 top
J33  [1X04]  8.08,36.47 90 top
J34  [1X04]  30.94,36.47 90 top
J35  [1X01]  8.08,46.63 0 top
J36  [1X01]  30.94,46.63 0 top
J37  [1X04]  33.93,36.47 90 top
J38  [1X04]  56.79,36.47 90 top
J39  [1X01]  33.93,46.63 0 top
J40  [1X01]  56.79,46.63 0 top
J41  [1X04]  59.79,36.47 90 top
J42  [1X04]  82.65,36.47 90 top
J43  [1X01]  59.79,46.63 0 top
J44  [1X01]  82.65,46.63 0 top
J45  [1X04]  85.65,36.47 90 top
J46  [1X04]  108.51,36.47 90 top
J47  [1X01]  85.65,46.63 0 top
J48  [1X01]  108.51,46.63 0 top
J49  [1X04]  111.51,36.47 90 top
J50  [1X04]  134.37,36.47 90 top
J51  [1X01]  111.51,46.63 0 top
J52  [1X01]  134.37,46.63 0 top
J53  [1X04]  137.36,36.47 90 top
J54  [1X04]  160.22,36.47 90 top
J55  [1X01]  137.36,46.63 0 top
J56  [1X01]  160.22,46.63 0 top
J57  [1X04]  163.22,36.47 90 top
J58  [1X04]  186.08,36.47 90 top
J59  [1X01]  163.22,46.63 0 top
J60  [1X01]  186.08,46.63 0 top
J61  [1X04]  189.08,36.47 90 top
J62  [1X04]  211.94,36.47 90 top
J63  [1X01]  189.08,46.63 0 top
J64  [1X01]  211.94,46.63 0 top
J65  [1X04]  8.08,64.87 90 top
J66  [1X04]  30.94,64.87 90 top
J67  [1X01]  8.08,75.03 0 top
J68  [1X01]  30.94,75.03 0 top
J69  [1X04]  33.93,64.87 90 top
J70  [1X04]  56.79,64.87 90 top
J71  [1X01]  33.93,75.03 0 top
J72  [1X01]  56.79,75.03 0 top
J73  [1X04]  59.79,64.87 90 top
J74  [1X04]  82.65,64.87 90 top
J75  [1X01]  59.79,75.03 0 top
J76  [1X01]  82.65,75.03 0 top
J77  [1X04]  85.65,64.87 90 top
J78  [1X04]  108.51,64.87 90 top
J79  [1X01]  85.65,75.03 0 top
J80  [1X01]  108.51,75.03 0 top
J81  [1X04]  111.51,64.87 90 top
J82  [1X04]  134.37,64.87 90 top
J83  [1X01]  111.51,75.03 0 top
J84  [1X01]  134.37,75.03 0 top
J85  [1X04]  137.36,64.87 90 top
J86  [1X04]  160.22,64.87 90 top
J87  [1X01]  137.36,75.03 0 top
J88  [1X01]  160.22,75.03 0 top
J89  [1X04]  163.22,64.87 90 top
J90  [1X04]  186.08,64.87 90 top
J91  [1X01]  163.22,75.03 0 top
J92  [1X01]  186.08,75.03 0 top
J93  [1X04]  189.08,64.87 90 top
J94  [1X04]  211.94,64.87 90 top
J95  [1X01]  189.08,75.03 0 top
J96  [1X01]  211.94,75.03 0 top
J97  [1X04]  8.08,93.27 90 top
J98  [1X04]  30.94,93.27 90 top
J99  [1X01]  8.08,103.43 0 top
J100  [1X01]  30.94,103.43 0 top
J101  [1X04]  33.93,93.27 90 top
J102  [1X04]  56.79,93.27 90 top
J103  [1X01]  33.93,103.43 0 top
J104  [1X01]  56.79,103.43 0 top
J105  [1X04]  59.79,93.27 90 top
J106  [1X04]  82.65,93.27 90 top
J107  [1X01]  59.79,103.43 0 top
J108  [1X01]  82.65,103.43 0 top
J109  [1X04]  85.65,93.27 90 top
J110  [1X04]  108.51,93.27 90 top
J111  [1X01]  85.65,103.43 0 top
J112  [1X01]  108.51,103.43 0 top
J113  [1X04]  111.51,93.27 90 top
J114  [1X04]  134.37,93.27 90 top
J115  [1X01]  111.51,103.43 0 top
J116  [1X01]  134.37,103.43 0 top
J117  [1X04]  137.36,93.27 90 top
J118  [1X04]  160.22,93.27 90 top
J119  [1X01]  137.36,103.43 0 top
J120  [1X01]  160.22,103.43 0 top
J121  [1X04]  163.22,93.27 90 top
J122  [1X04]  186.08,93.27 90 top
J123  [1X01]  163.22,103.43 0 top
J124  [1X01]  186.08,103.43 0 top
J125  [1X04]  189.08,93.27 90 top
J126  [1X04]  211.94,93.27 90 top
J127  [1X01]  189.08,103.43 0 top
J128  [1X01]  211.94,103.43 0 top
J129  [1X04]  8.08,121.67 90 top
J130  [1X04]  30.94,121.67 90 top
J131  [1X01]  8.08,131.83 0 top
J132  [1X01]  30.94,131.83 0 top
J133  [1X04]  33.93,121.67 90 top
J134  [1X04]  56.79,121.67 90 top
J135  [1X01]  33.93,131.83 0 top
J136  [1X01]  56.79,131.83 0 top
J137  [1X04]  59.79,121.67 90 top
J138  [1X04]  82.65,121.67 90 top
J139  [1X01]  59.79,131.83 0 top
J140  [1X01]  82.65,131.83 0 top
J141  [1X04]  85.65,121.67 90 top
J142  [1X04]  108.51,121.67 90 top
J143  [1X01]  85.65,131.83 0 top
J144  [1X01]  108.51,131.83 0 top
J145  [1X04]  111.51,121.67 90 top
J146  [1X04]  134.37,121.67 90 top
J147  [1X01]  111.51,131.83 0 top
J148  [1X01]  134.37,131.83 0 top
J149  [1X04]  137.36,121.67 90 top
J150  [1X04]  160.22,121.67 90 top
J151  [1X01]  137.36,131.83 0 top
J152  [1X01]  160.22,131.83 0 top
J153  [1X04]  163.22,121.67 90 top
J154  [1X04]  186.08,121.67 90 top
J155  [1X01]  163.22,131.83 0 top
J156  [1X01]  186.08,131.83 0 top
J157  [1X04]  189.08,121.67 90 top
J158  [1X04]  211.94,121.67 90 top
J159  [1X01]  189.08,131.83 0 top
J160  [1X01]  211.94,131.83 0 top
JP1  VIN  [1X02]  33.93,28.4 90 top
JP2  455-1750-1-ND  [1X04]  56.79,30.94 270 top
JP3  455-1750-1-ND  [1X04]  30.94,30.94 270 top
JP4  VIN  [1X02]  59.79,28.4 90 top
JP5  455-1750-1-ND  [1X04]  82.65,30.94 270 top
JP6  VIN  [1X02]  85.65,28.4 90 top
JP7  VIN  [1X02]  8.08,28.4 90 top
JP8  455-1750-1-ND  [1X04]  108.51,30.94 270 top
JP9  VIN  [1X02]  111.51,28.4 90 top
JP10  455-1750-1-ND  [1X04]  134.37,30.94 270 top
JP11  VIN  [1X02]  137.36,28.4 90 top
JP12  455-1750-1-ND  [1X04]  160.22,30.94 270 top
JP13  VIN  [1X02]  163.22,28.4 90 top
JP14  455-1750-1-ND  [1X04]  186.08,30.94 270 top
JP15  VIN  [1X02]  189.08,28.4 90 top
JP16  455-1750-1-ND  [1X04]  211.94,30.94 270 top
JP17  VIN  [1X02]  8.08,56.79 90 top
JP18  455-1750-1-ND  [1X04]  30.94,59.33 270 top
JP19  VIN  [1X02]  33.93,56.79 90 top
JP20  455-1750-1-ND  [1X04]  56.79,59.33 270 top
JP21  VIN  [1X02]  59.79,56.79 90 top
JP22  455-1750-1-ND  [1X04]  82.65,59.33 270 top
JP23  VIN  [1X02]  85.65,56.79 90 top
JP24  455-1750-1-ND  [1X04]  108.51,59.33 270 top
JP25  VIN  [1X02]  111.51,56.79 90 top
JP26  455-1750-1-ND  [1X04]  134.37,59.33 270 top
JP27  VIN  [1X02]  137.36,56.79 90 top
JP28  455-1750-1-ND  [1X04]  160.22,59.33 270 top
JP29  VIN  [1X02]  163.22,56.79 90 top
JP30  455-1750-1-ND  [1X04]  186.08,59.33 270 top
JP31  VIN  [1X02]  189.08,56.79 90 top
JP32  455-1750-1-ND  [1X04]  211.94,59.33 270 top
JP33  VIN  [1X02]  8.08,85.19 90 top
JP34  455-1750-1-ND  [1X04]  30.94,87.73 270 top
JP35  VIN  [1X02]  33.93,85.19 90 top
JP36  455-1750-1-ND  [1X04]  56.79,87.73 270 top
JP37  VIN  [1X02]  59.79,85.19 90 top
JP38  455-1750-1-ND  [1X04]  82.65,87.73 270 top
JP39  VIN  [1X02]  85.65,85.19 90 top
JP40  455-1750-1-ND  [1X04]  108.51,87.73 270 top
JP41  VIN  [1X02]  111.51,85.19 90 top
JP42  455-1750-1-ND  [1X04]  134.37,87.73 270 top
JP43  VIN  [1X02]  137.36,85.19 90 top
JP44  455-1750-1-ND  [1X04]  160.22,87.73 270 top
JP45  VIN  [1X02]  163.22,85.19 90 top
JP46  455-1750-1-ND  [1X04]  186.08,87.73 270 top
JP47  VIN  [1X02]  189.08,85.19 90 top
JP48  455-1750-1-ND  [1X04]  211.94,87.73 270 top
JP49  VIN  [1X02]  8.08,113.59 90 top
JP50  455-1750-1-ND  [1X04]  30.94,116.13 270 top
JP51  VIN  [1X02]  33.93,113.59 90 top
JP52  455-1750-1-ND  [1X04]  56.79,116.13 270 top
JP53  VIN  [1X02]  59.79,113.59 90 top
JP54  455-1750-1-ND  [1X04]  82.65,116.13 270 top
JP55  VIN  [1X02]  85.65,113.59 90 top
JP56  455-1750-1-ND  [1X04]  108.51,116.13 270 top
JP57  VIN  [1X02]  111.51,113.59 90 top
JP58  455-1750-1-ND  [1X04]  134.37,116.13 270 top
JP59  VIN  [1X02]  137.36,113.59 90 top
JP60  455-1750-1-ND  [1X04]  160.22,116.13 270 top
JP61  VIN  [1X02]  163.22,113.59 90 top
JP62  455-1750-1-ND  [1X04]  186.08,116.13 270 top
JP63  VIN  [1X02]  189.08,113.59 90 top
JP64  455-1750-1-ND  [1X04]  211.94,116.13 270 top
JP65  VIN  [1X02]  8.08,141.99 90 top
JP66  455-1750-1-ND  [1X04]  30.94,144.53 270 top
JP67  VIN  [1X02]  33.93,141.99 90 top
JP68  455-1750-1-ND  [1X04]  56.79,144.53 270 top
JP69  VIN  [1X02]  59.79,141.99 90 top
JP70  455-1750-1-ND  [1X04]  82.65,144.53 270 top
JP71  VIN  [1X02]  85.65,141.99 90 top
JP72  455-1750-1-ND  [1X04]  108.51,144.53 270 top
JP73  VIN  [1X02]  111.51,141.99 90 top
JP74  455-1750-1-ND  [1X04]  134.37,144.53 270 top
JP75  VIN  [1X02]  137.36,141.99 90 top
JP76  455-1750-1-ND  [1X04]  160.22,144.53 270 top
JP77  VIN  [1X02]  163.22,141.99 90 top
JP78  455-1750-1-ND  [1X04]  186.08,144.53 270 top
JP79  VIN  [1X02]  189.08,141.99 90 top
JP80  455-1750-1-ND  [1X04]  211.94,144.53 270 top
L1  2.2µH/±20%/1.5A  [INDUCTOR_2.2UH]  17.55,32.25 180 top
L2  2.2µH/±20%/1.5A  [INDUCTOR_2.2UH]  43.41,32.25 180 top
L3  2.2µH/±20%/1.5A  [INDUCTOR_2.2UH]  69.27,32.25 180 top
L4  2.2µH/±20%/1.5A  [INDUCTOR_2.2UH]  95.12,32.25 180 top
L5  2.2µH/±20%/1.5A  [INDUCTOR_2.2UH]  120.98,32.25 180 top
L6  2.2µH/±20%/1.5A  [INDUCTOR_2.2UH]  146.84,32.25 180 top
L7  2.2µH/±20%/1.5A  [INDUCTOR_2.2UH]  172.69,32.25 180 top
L8  2.2µH/±20%/1.5A  [INDUCTOR_2.2UH]  198.55,32.25 180 top
L9  2.2µH/±20%/1.5A  [INDUCTOR_2.2UH]  17.55,60.64 180 top
L10  2.2µH/±20%/1.5A  [INDUCTOR_2.2UH]  43.41,60.64 180 top
L11  2.2µH/±20%/1.5A  [INDUCTOR_2.2UH]  69.27,60.64 180 top
L12  2.2µH/±20%/1.5A  [INDUCTOR_2.2UH]  95.12,60.64 180 top
L13  2.2µH/±20%/1.5A  [INDUCTOR_2.2UH]  120.98,60.64 180 top
L14  2.2µH/±20%/1.5A  [INDUCTOR_2.2UH]  146.84,60.64 180 top
L15  2.2µH/±20%/1.5A  [INDUCTOR_2.2UH]  172.69,60.64 180 top
L16  2.2µH/±20%/1.5A  [INDUCTOR_2.2UH]  198.55,60.64 180 top
L17  2.2µH/±20%/1.5A  [INDUCTOR_2.2UH]  17.55,89.04 180 top
L18  2.2µH/±20%/1.5A  [INDUCTOR_2.2UH]  43.41,89.04 180 top
L19  2.2µH/±20%/1.5A  [INDUCTOR_2.2UH]  69.27,89.04 180 top
L20  2.2µH/±20%/1.5A  [INDUCTOR_2.2UH]  95.12,89.04 180 top
L21  2.2µH/±20%/1.5A  [INDUCTOR_2.2UH]  120.98,89.04 180 top
L22  2.2µH/±20%/1.5A  [INDUCTOR_2.2UH]  146.84,89.04 180 top
L23  2.2µH/±20%/1.5A  [INDUCTOR_2.2UH]  172.69,89.04 180 top
L24  2.2µH/±20%/1.5A  [INDUCTOR_2.2UH]  198.55,89.04 180 top
L25  2.2µH/±20%/1.5A  [INDUCTOR_2.2UH]  17.55,117.44 180 top
L26  2.2µH/±20%/1.5A  [INDUCTOR_2.2UH]  43.41,117.44 180 top
L27  2.2µH/±20%/1.5A  [INDUCTOR_2.2UH]  69.27,117.44 180 top
L28  2.2µH/±20%/1.5A  [INDUCTOR_2.2UH]  95.12,117.44 180 top
L29  2.2µH/±20%/1.5A  [INDUCTOR_2.2UH]  120.98,117.44 180 top
L30  2.2µH/±20%/1.5A  [INDUCTOR_2.2UH]  146.84,117.44 180 top
L31  2.2µH/±20%/1.5A  [INDUCTOR_2.2UH]  172.69,117.44 180 top
L32  2.2µH/±20%/1.5A  [INDUCTOR_2.2UH]  198.55,117.44 180 top
L33  2.2µH/±20%/1.5A  [INDUCTOR_2.2UH]  17.55,145.83 180 top
L34  2.2µH/±20%/1.5A  [INDUCTOR_2.2UH]  43.41,145.83 180 top
L35  2.2µH/±20%/1.5A  [INDUCTOR_2.2UH]  69.27,145.83 180 top
L36  2.2µH/±20%/1.5A  [INDUCTOR_2.2UH]  95.12,145.83 180 top
L37  2.2µH/±20%/1.5A  [INDUCTOR_2.2UH]  120.98,145.83 180 top
L38  2.2µH/±20%/1.5A  [INDUCTOR_2.2UH]  146.84,145.83 180 top
L39  2.2µH/±20%/1.5A  [INDUCTOR_2.2UH]  172.69,145.83 180 top
L40  2.2µH/±20%/1.5A  [INDUCTOR_2.2UH]  198.55,145.83 180 top
LOGO1  SFE_LOGO_NAME_FLAME.1_INCH  [SFE_LOGO_NAME_FLAME_.1]  25.22,25.86 0 bottom
LOGO2  OSHW-LOGOS  [OSHW-LOGO-S]  10.34,22.92 0 bottom
LOGO3  OSHW-LOGOS  [OSHW-LOGO-S]  36.2,22.92 0 bottom
LOGO4  SFE_LOGO_NAME_FLAME.1_INCH  [SFE_LOGO_NAME_FLAME_.1]  51.08,25.86 0 bottom
LOGO5  OSHW-LOGOS  [OSHW-LOGO-S]  62.05,22.92 0 bottom
LOGO6  SFE_LOGO_NAME_FLAME.1_INCH  [SFE_LOGO_NAME_FLAME_.1]  76.94,25.86 0 bottom
LOGO7  OSHW-LOGOS  [OSHW-LOGO-S]  87.91,22.92 0 bottom
LOGO8  SFE_LOGO_NAME_FLAME.1_INCH  [SFE_LOGO_NAME_FLAME_.1]  102.79,25.86 0 bottom
LOGO9  OSHW-LOGOS  [OSHW-LOGO-S]  113.77,22.92 0 bottom
LOGO10  SFE_LOGO_NAME_FLAME.1_INCH  [SFE_LOGO_NAME_FLAME_.1]  128.65,25.86 0 bottom
LOGO11  OSHW-LOGOS  [OSHW-LOGO-S]  139.62,22.92 0 bottom
LOGO12  SFE_LOGO_NAME_FLAME.1_INCH  [SFE_LOGO_NAME_FLAME_.1]  154.51,25.86 0 bottom
LOGO13  OSHW-LOGOS  [OSHW-LOGO-S]  165.48,22.92 0 bottom
LOGO14  SFE_LOGO_NAME_FLAME.1_INCH  [SFE_LOGO_NAME_FLAME_.1]  180.37,25.86 0 bottom
LOGO15  OSHW-LOGOS  [OSHW-LOGO-S]  191.34,22.92 0 bottom
LOGO16  SFE_LOGO_NAME_FLAME.1_INCH  [SFE_LOGO_NAME_FLAME_.1]  206.22,25.86 0 bottom
LOGO17  OSHW-LOGOS  [OSHW-LOGO-S]  10.34,51.32 0 bottom
LOGO18  SFE_LOGO_NAME_FLAME.1_INCH  [SFE_LOGO_NAME_FLAME_.1]  25.22,54.25 0 bottom
LOGO19  OSHW-LOGOS  [OSHW-LOGO-S]  36.2,51.32 0 bottom
LOGO20  SFE_LOGO_NAME_FLAME.1_INCH  [SFE_LOGO_NAME_FLAME_.1]  51.08,54.25 0 bottom
LOGO21  OSHW-LOGOS  [OSHW-LOGO-S]  62.05,51.32 0 bottom
LOGO22  SFE_LOGO_NAME_FLAME.1_INCH  [SFE_LOGO_NAME_FLAME_.1]  76.94,54.25 0 bottom
LOGO23  OSHW-LOGOS  [OSHW-LOGO-S]  87.91,51.32 0 bottom
LOGO24  SFE_LOGO_NAME_FLAME.1_INCH  [SFE_LOGO_NAME_FLAME_.1]  102.79,54.25 0 bottom
LOGO25  OSHW-LOGOS  [OSHW-LOGO-S]  113.77,51.32 0 bottom
LOGO26  SFE_LOGO_NAME_FLAME.1_INCH  [SFE_LOGO_NAME_FLAME_.1]  128.65,54.25 0 bottom
LOGO27  OSHW-LOGOS  [OSHW-LOGO-S]  139.62,51.32 0 bottom
LOGO28  SFE_LOGO_NAME_FLAME.1_INCH  [SFE_LOGO_NAME_FLAME_.1]  154.51,54.25 0 bottom
LOGO29  OSHW-LOGOS  [OSHW-LOGO-S]  165.48,51.32 0 bottom
LOGO30  SFE_LOGO_NAME_FLAME.1_INCH  [SFE_LOGO_NAME_FLAME_.1]  180.37,54.25 0 bottom
LOGO31  OSHW-LOGOS  [OSHW-LOGO-S]  191.34,51.32 0 bottom
LOGO32  SFE_LOGO_NAME_FLAME.1_INCH  [SFE_LOGO_NAME_FLAME_.1]  206.22,54.25 0 bottom
LOGO33  OSHW-LOGOS  [OSHW-LOGO-S]  10.34,79.72 0 bottom
LOGO34  SFE_LOGO_NAME_FLAME.1_INCH  [SFE_LOGO_NAME_FLAME_.1]  25.22,82.65 0 bottom
LOGO35  OSHW-LOGOS  [OSHW-LOGO-S]  36.2,79.72 0 bottom
LOGO36  SFE_LOGO_NAME_FLAME.1_INCH  [SFE_LOGO_NAME_FLAME_.1]  51.08,82.65 0 bottom
LOGO37  OSHW-LOGOS  [OSHW-LOGO-S]  62.05,79.72 0 bottom
LOGO38  SFE_LOGO_NAME_FLAME.1_INCH  [SFE_LOGO_NAME_FLAME_.1]  76.94,82.65 0 bottom
LOGO39  OSHW-LOGOS  [OSHW-LOGO-S]  87.91,79.72 0 bottom
LOGO40  SFE_LOGO_NAME_FLAME.1_INCH  [SFE_LOGO_NAME_FLAME_.1]  102.79,82.65 0 bottom
LOGO41  OSHW-LOGOS  [OSHW-LOGO-S]  113.77,79.72 0 bottom
LOGO42  SFE_LOGO_NAME_FLAME.1_INCH  [SFE_LOGO_NAME_FLAME_.1]  128.65,82.65 0 bottom
LOGO43  OSHW-LOGOS  [OSHW-LOGO-S]  139.62,79.72 0 bottom
LOGO44  SFE_LOGO_NAME_FLAME.1_INCH  [SFE_LOGO_NAME_FLAME_.1]  154.51,82.65 0 bottom
LOGO45  OSHW-LOGOS  [OSHW-LOGO-S]  165.48,79.72 0 bottom
LOGO46  SFE_LOGO_NAME_FLAME.1_INCH  [SFE_LOGO_NAME_FLAME_.1]  180.37,82.65 0 bottom
LOGO47  OSHW-LOGOS  [OSHW-LOGO-S]  191.34,79.72 0 bottom
LOGO48  SFE_LOGO_NAME_FLAME.1_INCH  [SFE_LOGO_NAME_FLAME_.1]  206.22,82.65 0 bottom
LOGO49  OSHW-LOGOS  [OSHW-LOGO-S]  10.34,108.12 0 bottom
LOGO50  SFE_LOGO_NAME_FLAME.1_INCH  [SFE_LOGO_NAME_FLAME_.1]  25.22,111.05 0 bottom
LOGO51  OSHW-LOGOS  [OSHW-LOGO-S]  36.2,108.12 0 bottom
LOGO52  SFE_LOGO_NAME_FLAME.1_INCH  [SFE_LOGO_NAME_FLAME_.1]  51.08,111.05 0 bottom
LOGO53  OSHW-LOGOS  [OSHW-LOGO-S]  62.05,108.12 0 bottom
LOGO54  SFE_LOGO_NAME_FLAME.1_INCH  [SFE_LOGO_NAME_FLAME_.1]  76.94,111.05 0 bottom
LOGO55  OSHW-LOGOS  [OSHW-LOGO-S]  87.91,108.12 0 bottom
LOGO56  SFE_LOGO_NAME_FLAME.1_INCH  [SFE_LOGO_NAME_FLAME_.1]  102.79,111.05 0 bottom
LOGO57  OSHW-LOGOS  [OSHW-LOGO-S]  113.77,108.12 0 bottom
LOGO58  SFE_LOGO_NAME_FLAME.1_INCH  [SFE_LOGO_NAME_FLAME_.1]  128.65,111.05 0 bottom
LOGO59  OSHW-LOGOS  [OSHW-LOGO-S]  139.62,108.12 0 bottom
LOGO60  SFE_LOGO_NAME_FLAME.1_INCH  [SFE_LOGO_NAME_FLAME_.1]  154.51,111.05 0 bottom
LOGO61  OSHW-LOGOS  [OSHW-LOGO-S]  165.48,108.12 0 bottom
LOGO62  SFE_LOGO_NAME_FLAME.1_INCH  [SFE_LOGO_NAME_FLAME_.1]  180.37,111.05 0 bottom
LOGO63  OSHW-LOGOS  [OSHW-LOGO-S]  191.34,108.12 0 bottom
LOGO64  SFE_LOGO_NAME_FLAME.1_INCH  [SFE_LOGO_NAME_FLAME_.1]  206.22,111.05 0 bottom
LOGO65  OSHW-LOGOS  [OSHW-LOGO-S]  10.34,136.51 0 bottom
LOGO66  SFE_LOGO_NAME_FLAME.1_INCH  [SFE_LOGO_NAME_FLAME_.1]  25.22,139.45 0 bottom
LOGO67  OSHW-LOGOS  [OSHW-LOGO-S]  36.2,136.51 0 bottom
LOGO68  SFE_LOGO_NAME_FLAME.1_INCH  [SFE_LOGO_NAME_FLAME_.1]  51.08,139.45 0 bottom
LOGO69  OSHW-LOGOS  [OSHW-LOGO-S]  62.05,136.51 0 bottom
LOGO70  SFE_LOGO_NAME_FLAME.1_INCH  [SFE_LOGO_NAME_FLAME_.1]  76.94,139.45 0 bottom
LOGO71  OSHW-LOGOS  [OSHW-LOGO-S]  87.91,136.51 0 bottom
LOGO72  SFE_LOGO_NAME_FLAME.1_INCH  [SFE_LOGO_NAME_FLAME_.1]  102.79,139.45 0 bottom
LOGO73  OSHW-LOGOS  [OSHW-LOGO-S]  113.77,136.51 0 bottom
LOGO74  SFE_LOGO_NAME_FLAME.1_INCH  [SFE_LOGO_NAME_FLAME_.1]  128.65,139.45 0 bottom
LOGO75  OSHW-LOGOS  [OSHW-LOGO-S]  139.62,136.51 0 bottom
LOGO76  SFE_LOGO_NAME_FLAME.1_INCH  [SFE_LOGO_NAME_FLAME_.1]  154.51,139.45 0 bottom
LOGO77  OSHW-LOGOS  [OSHW-LOGO-S]  165.48,136.51 0 bottom
LOGO78  SFE_LOGO_NAME_FLAME.1_INCH  [SFE_LOGO_NAME_FLAME_.1]  180.37,139.45 0 bottom
LOGO79  OSHW-LOGOS  [OSHW-LOGO-S]  191.34,136.51 0 bottom
LOGO80  SFE_LOGO_NAME_FLAME.1_INCH  [SFE_LOGO_NAME_FLAME_.1]  206.22,139.45 0 bottom
R1  [AXIAL-0.3]  19.51,8.08 0 top
R2  22k  [0603]  13.64,11.89 270 top
R3  13k  [0603]  19.51,8.08 0 top
R4  1k  [0603]  23.67,12.75 90 top
R5  1.8M  [0603]  24.9,24.11 0 top
R6  200k  [0603]  21.57,24.11 0 top
R7  200k  [0603]  47.43,24.11 0 top
R8  1.8M  [0603]  50.76,24.11 0 top
R9  13k  [0603]  45.36,8.08 0 top
R10  22k  [0603]  39.5,11.89 270 top
R11  [AXIAL-0.3]  45.36,8.08 0 top
R12  1k  [0603]  49.53,12.75 90 top
R13  200k  [0603]  73.29,24.11 0 top
R14  1.8M  [0603]  76.62,24.11 0 top
R15  13k  [0603]  71.22,8.08 0 top
R16  22k  [0603]  65.36,11.89 270 top
R17  [AXIAL-0.3]  71.22,8.08 0 top
R18  1k  [0603]  75.38,12.75 90 top
R19  200k  [0603]  99.14,24.11 0 top
R20  1.8M  [0603]  102.48,24.11 0 top
R21  13k  [0603]  97.08,8.08 0 top
R22  22k  [0603]  91.21,11.89 270 top
R23  [AXIAL-0.3]  97.08,8.08 0 top
R24  1k  [0603]  101.24,12.75 90 top
R25  200k  [0603]  125,24.11 0 top
R26  1.8M  [0603]  128.33,24.11 0 top
R27  13k  [0603]  122.94,8.08 0 top
R28  22k  [0603]  117.07,11.89 270 top
R29  [AXIAL-0.3]  122.94,8.08 0 top
R30  1k  [0603]  127.1,12.75 90 top
R31  200k  [0603]  150.86,24.11 0 top
R32  1.8M  [0603]  154.19,24.11 0 top
R33  13k  [0603]  148.79,8.08 0 top
R34  22k  [0603]  142.93,11.89 270 top
R35  [AXIAL-0.3]  148.79,8.08 0 top
R36  1k  [0603]  152.96,12.75 90 top
R37  200k  [0603]  176.71,24.11 0 top
R38  1.8M  [0603]  180.05,24.11 0 top
R39  13k  [0603]  174.65,8.08 0 top
R40  22k  [0603]  168.79,11.89 270 top
R41  [AXIAL-0.3]  174.65,8.08 0 top
R42  1k  [0603]  178.81,12.75 90 top
R43  200k  [0603]  202.57,24.11 0 top
R44  1.8M  [0603]  205.91,24.11 0 top
R45  13k  [0603]  200.51,8.08 0 top
R46  22k  [0603]  194.64,11.89 270 top
R47  [AXIAL-0.3]  200.51,8.08 0 top
R48  1k  [0603]  204.67,12.75 90 top
R49  200k  [0603]  21.57,52.51 0 top
R50  1.8M  [0603]  24.9,52.51 0 top
R51  13k  [0603]  19.51,36.47 0 top
R52  22k  [0603]  13.64,40.28 270 top
R53  [AXIAL-0.3]  19.51,36.47 0 top
R54  1k  [0603]  23.67,41.15 90 top
R55  200k  [0603]  47.43,52.51 0 top
R56  1.8M  [0603]  50.76,52.51 0 top
R57  13k  [0603]  45.36,36.47 0 top
R58  22k  [0603]  39.5,40.28 270 top
R59  [AXIAL-0.3]  45.36,36.47 0 top
R60  1k  [0603]  49.53,41.15 90 top
R61  200k  [0603]  73.29,52.51 0 top
R62  1.8M  [0603]  76.62,52.51 0 top
R63  13k  [0603]  71.22,36.47 0 top
R64  22k  [0603]  65.36,40.28 270 top
R65  [AXIAL-0.3]  71.22,36.47 0 top
R66  1k  [0603]  75.38,41.15 90 top
R67  200k  [0603]  99.14,52.51 0 top
R68  1.8M  [0603]  102.48,52.51 0 top
R69  13k  [0603]  97.08,36.47 0 top
R70  22k  [0603]  91.21,40.28 270 top
R71  [AXIAL-0.3]  97.08,36.47 0 top
R72  1k  [0603]  101.24,41.15 90 top
R73  200k  [0603]  125,52.51 0 top
R74  1.8M  [0603]  128.33,52.51 0 top
R75  13k  [0603]  122.94,36.47 0 top
R76  22k  [0603]  117.07,40.28 270 top
R77  [AXIAL-0.3]  122.94,36.47 0 top
R78  1k  [0603]  127.1,41.15 90 top
R79  200k  [0603]  150.86,52.51 0 top
R80  1.8M  [0603]  154.19,52.51 0 top
R81  13k  [0603]  148.79,36.47 0 top
R82  22k  [0603]  142.93,40.28 270 top
R83  [AXIAL-0.3]  148.79,36.47 0 top
R84  1k  [0603]  152.96,41.15 90 top
R85  200k  [0603]  176.71,52.51 0 top
R86  1.8M  [0603]  180.05,52.51 0 top
R87  13k  [0603]  174.65,36.47 0 top
R88  22k  [0603]  168.79,40.28 270 top
R89  [AXIAL-0.3]  174.65,36.47 0 top
R90  1k  [0603]  178.81,41.15 90 top
R91  200k  [0603]  202.57,52.51 0 top
R92  1.8M  [0603]  205.91,52.51 0 top
R93  13k  [0603]  200.51,36.47 0 top
R94  22k  [0603]  194.64,40.28 270 top
R95  [AXIAL-0.3]  200.51,36.47 0 top
R96  1k  [0603]  204.67,41.15 90 top
R97  200k  [0603]  21.57,80.91 0 top
R98  1.8M  [0603]  24.9,80.91 0 top
R99  13k  [0603]  19.51,64.87 0 top
R100  22k  [0603]  13.64,68.68 270 top
R101  [AXIAL-0.3]  19.51,64.87 0 top
R102  1k  [0603]  23.67,69.55 90 top
R103  200k  [0603]  47.43,80.91 0 top
R104  1.8M  [0603]  50.76,80.91 0 top
R105  13k  [0603]  45.36,64.87 0 top
R106  22k  [0603]  39.5,68.68 270 top
R107  [AXIAL-0.3]  45.36,64.87 0 top
R108  1k  [0603]  49.53,69.55 90 top
R109  200k  [0603]  73.29,80.91 0 top
R110  1.8M  [0603]  76.62,80.91 0 top
R111  13k  [0603]  71.22,64.87 0 top
R112  22k  [0603]  65.36,68.68 270 top
R113  [AXIAL-0.3]  71.22,64.87 0 top
R114  1k  [0603]  75.38,69.55 90 top
R115  200k  [0603]  99.14,80.91 0 top
R116  1.8M  [0603]  102.48,80.91 0 top
R117  13k  [0603]  97.08,64.87 0 top
R118  22k  [0603]  91.21,68.68 270 top
R119  [AXIAL-0.3]  97.08,64.87 0 top
R120  1k  [0603]  101.24,69.55 90 top
R121  200k  [0603]  125,80.91 0 top
R122  1.8M  [0603]  128.33,80.91 0 top
R123  13k  [0603]  122.94,64.87 0 top
R124  22k  [0603]  117.07,68.68 270 top
R125  [AXIAL-0.3]  122.94,64.87 0 top
R126  1k  [0603]  127.1,69.55 90 top
R127  200k  [0603]  150.86,80.91 0 top
R128  1.8M  [0603]  154.19,80.91 0 top
R129  13k  [0603]  148.79,64.87 0 top
R130  22k  [0603]  142.93,68.68 270 top
R131  [AXIAL-0.3]  148.79,64.87 0 top
R132  1k  [0603]  152.96,69.55 90 top
R133  200k  [0603]  176.71,80.91 0 top
R134  1.8M  [0603]  180.05,80.91 0 top
R135  13k  [0603]  174.65,64.87 0 top
R136  22k  [0603]  168.79,68.68 270 top
R137  [AXIAL-0.3]  174.65,64.87 0 top
R138  1k  [0603]  178.81,69.55 90 top
R139  200k  [0603]  202.57,80.91 0 top
R140  1.8M  [0603]  205.91,80.91 0 top
R141  13k  [0603]  200.51,64.87 0 top
R142  22k  [0603]  194.64,68.68 270 top
R143  [AXIAL-0.3]  200.51,64.87 0 top
R144  1k  [0603]  204.67,69.55 90 top
R145  200k  [0603]  21.57,109.3 0 top
R146  1.8M  [0603]  24.9,109.3 0 top
R147  13k  [0603]  19.51,93.27 0 top
R148  22k  [0603]  13.64,97.08 270 top
R149  [AXIAL-0.3]  19.51,93.27 0 top
R150  1k  [0603]  23.67,97.94 90 top
R151  200k  [0603]  47.43,109.3 0 top
R152  1.8M  [0603]  50.76,109.3 0 top
R153  13k  [0603]  45.36,93.27 0 top
R154  22k  [0603]  39.5,97.08 270 top
R155  [AXIAL-0.3]  45.36,93.27 0 top
R156  1k  [0603]  49.53,97.94 90 top
R157  200k  [0603]  73.29,109.3 0 top
R158  1.8M  [0603]  76.62,109.3 0 top
R159  13k  [0603]  71.22,93.27 0 top
R160  22k  [0603]  65.36,97.08 270 top
R161  [AXIAL-0.3]  71.22,93.27 0 top
R162  1k  [0603]  75.38,97.94 90 top
R163  200k  [0603]  99.14,109.3 0 top
R164  1.8M  [0603]  102.48,109.3 0 top
R165  13k  [0603]  97.08,93.27 0 top
R166  22k  [0603]  91.21,97.08 270 top
R167  [AXIAL-0.3]  97.08,93.27 0 top
R168  1k  [0603]  101.24,97.94 90 top
R169  200k  [0603]  125,109.3 0 top
R170  1.8M  [0603]  128.33,109.3 0 top
R171  13k  [0603]  122.94,93.27 0 top
R172  22k  [0603]  117.07,97.08 270 top
R173  [AXIAL-0.3]  122.94,93.27 0 top
R174  1k  [0603]  127.1,97.94 90 top
R175  200k  [0603]  150.86,109.3 0 top
R176  1.8M  [0603]  154.19,109.3 0 top
R177  13k  [0603]  148.79,93.27 0 top
R178  22k  [0603]  142.93,97.08 270 top
R179  [AXIAL-0.3]  148.79,93.27 0 top
R180  1k  [0603]  152.96,97.94 90 top
R181  200k  [0603]  176.71,109.3 0 top
R182  1.8M  [0603]  180.05,109.3 0 top
R183  13k  [0603]  174.65,93.27 0 top
R184  22k  [0603]  168.79,97.08 270 top
R185  [AXIAL-0.3]  174.65,93.27 0 top
R186  1k  [0603]  178.81,97.94 90 top
R187  200k  [0603]  202.57,109.3 0 top
R188  1.8M  [0603]  205.91,109.3 0 top
R189  13k  [0603]  200.51,93.27 0 top
R190  22k  [0603]  194.64,97.08 270 top
R191  [AXIAL-0.3]  200.51,93.27 0 top
R192  1k  [0603]  204.67,97.94 90 top
R193  200k  [0603]  21.57,137.7 0 top
R194  1.8M  [0603]  24.9,137.7 0 top